# Altium PCB cahrgebot_digital.PcbDoc (part 1 of 2)
Units mm, origin at the board's own origin, x right, y up, seen from the top; angles counter-clockwise.
Board outline 99.66 x 99.5 mm, 4 copper layers (Top Layer, GND, POWER, Bottom Layer), stack 1.591 mm thick; 129 components, 91 nets, 432 pads, 108 vias.
Unrouted connection lines stored in the file: 110.
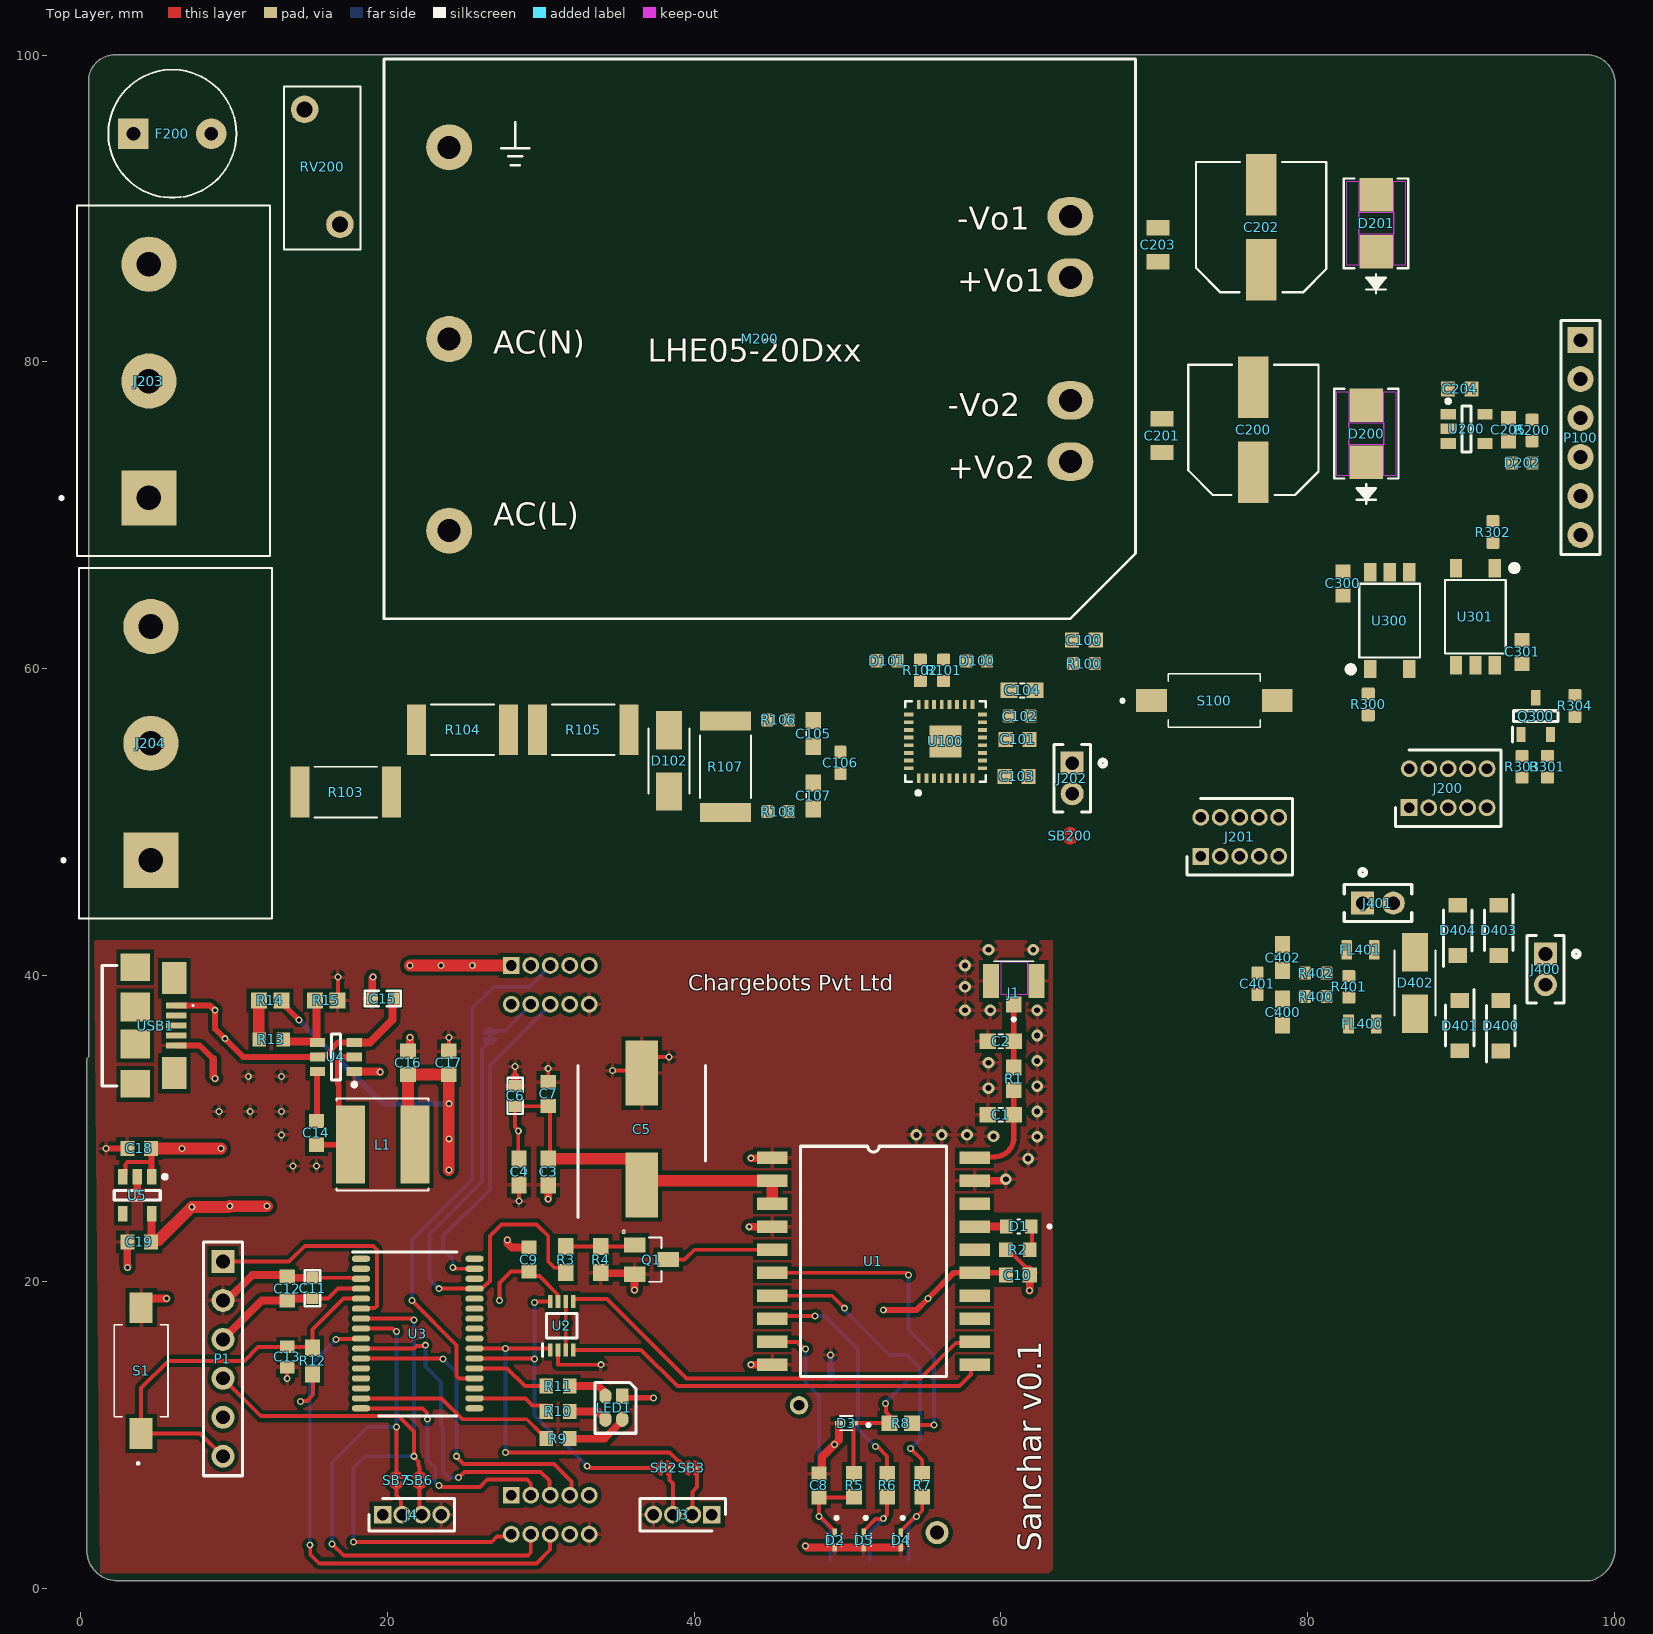
[diagram p0: Top Layer view]
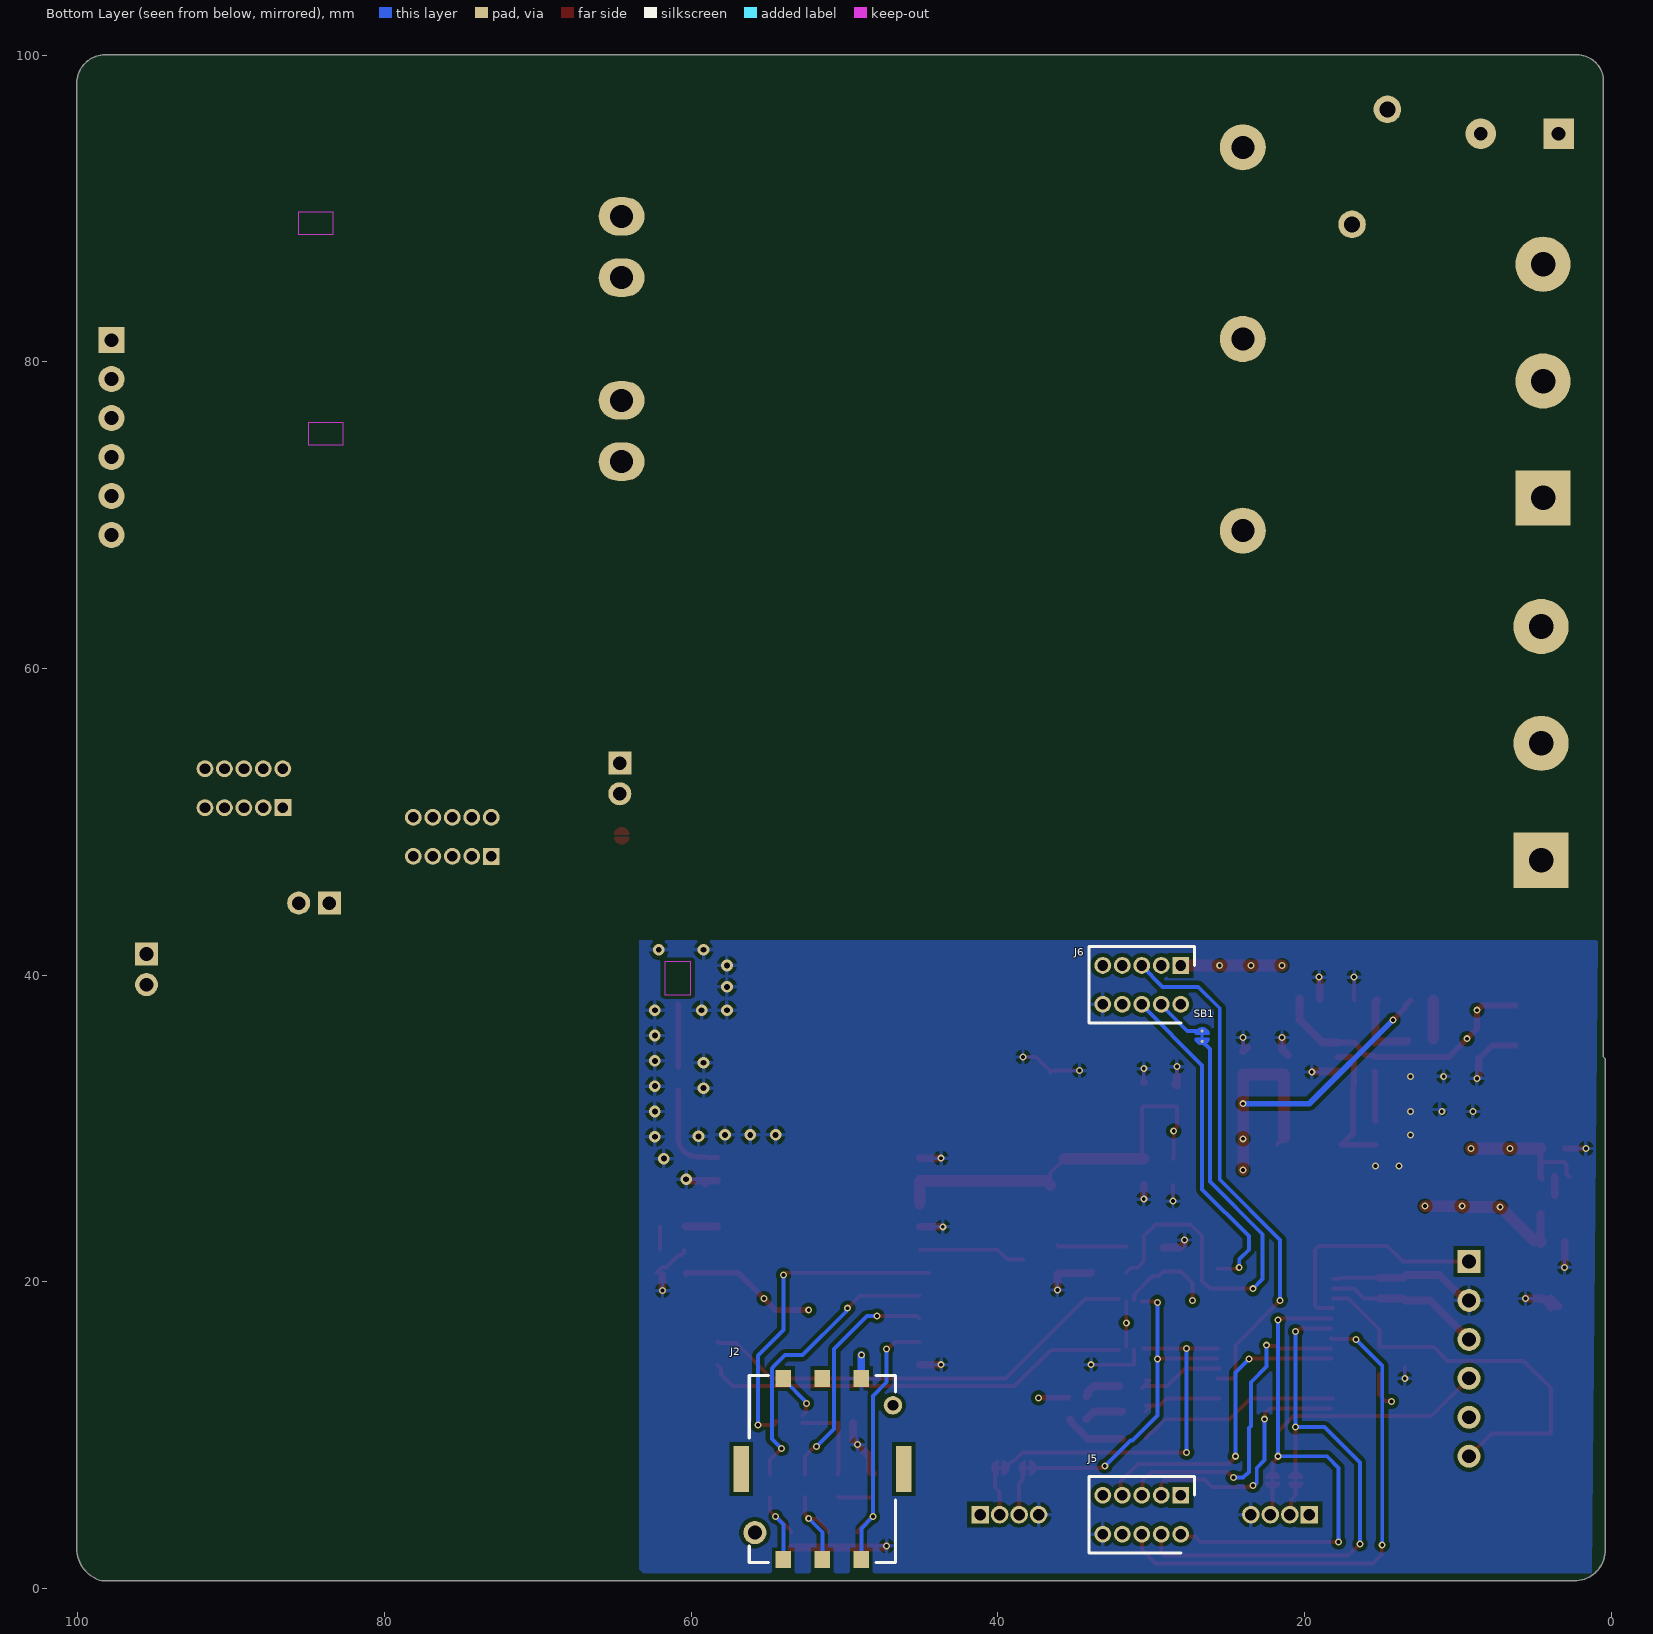
[diagram p1: Bottom Layer view, seen from below]
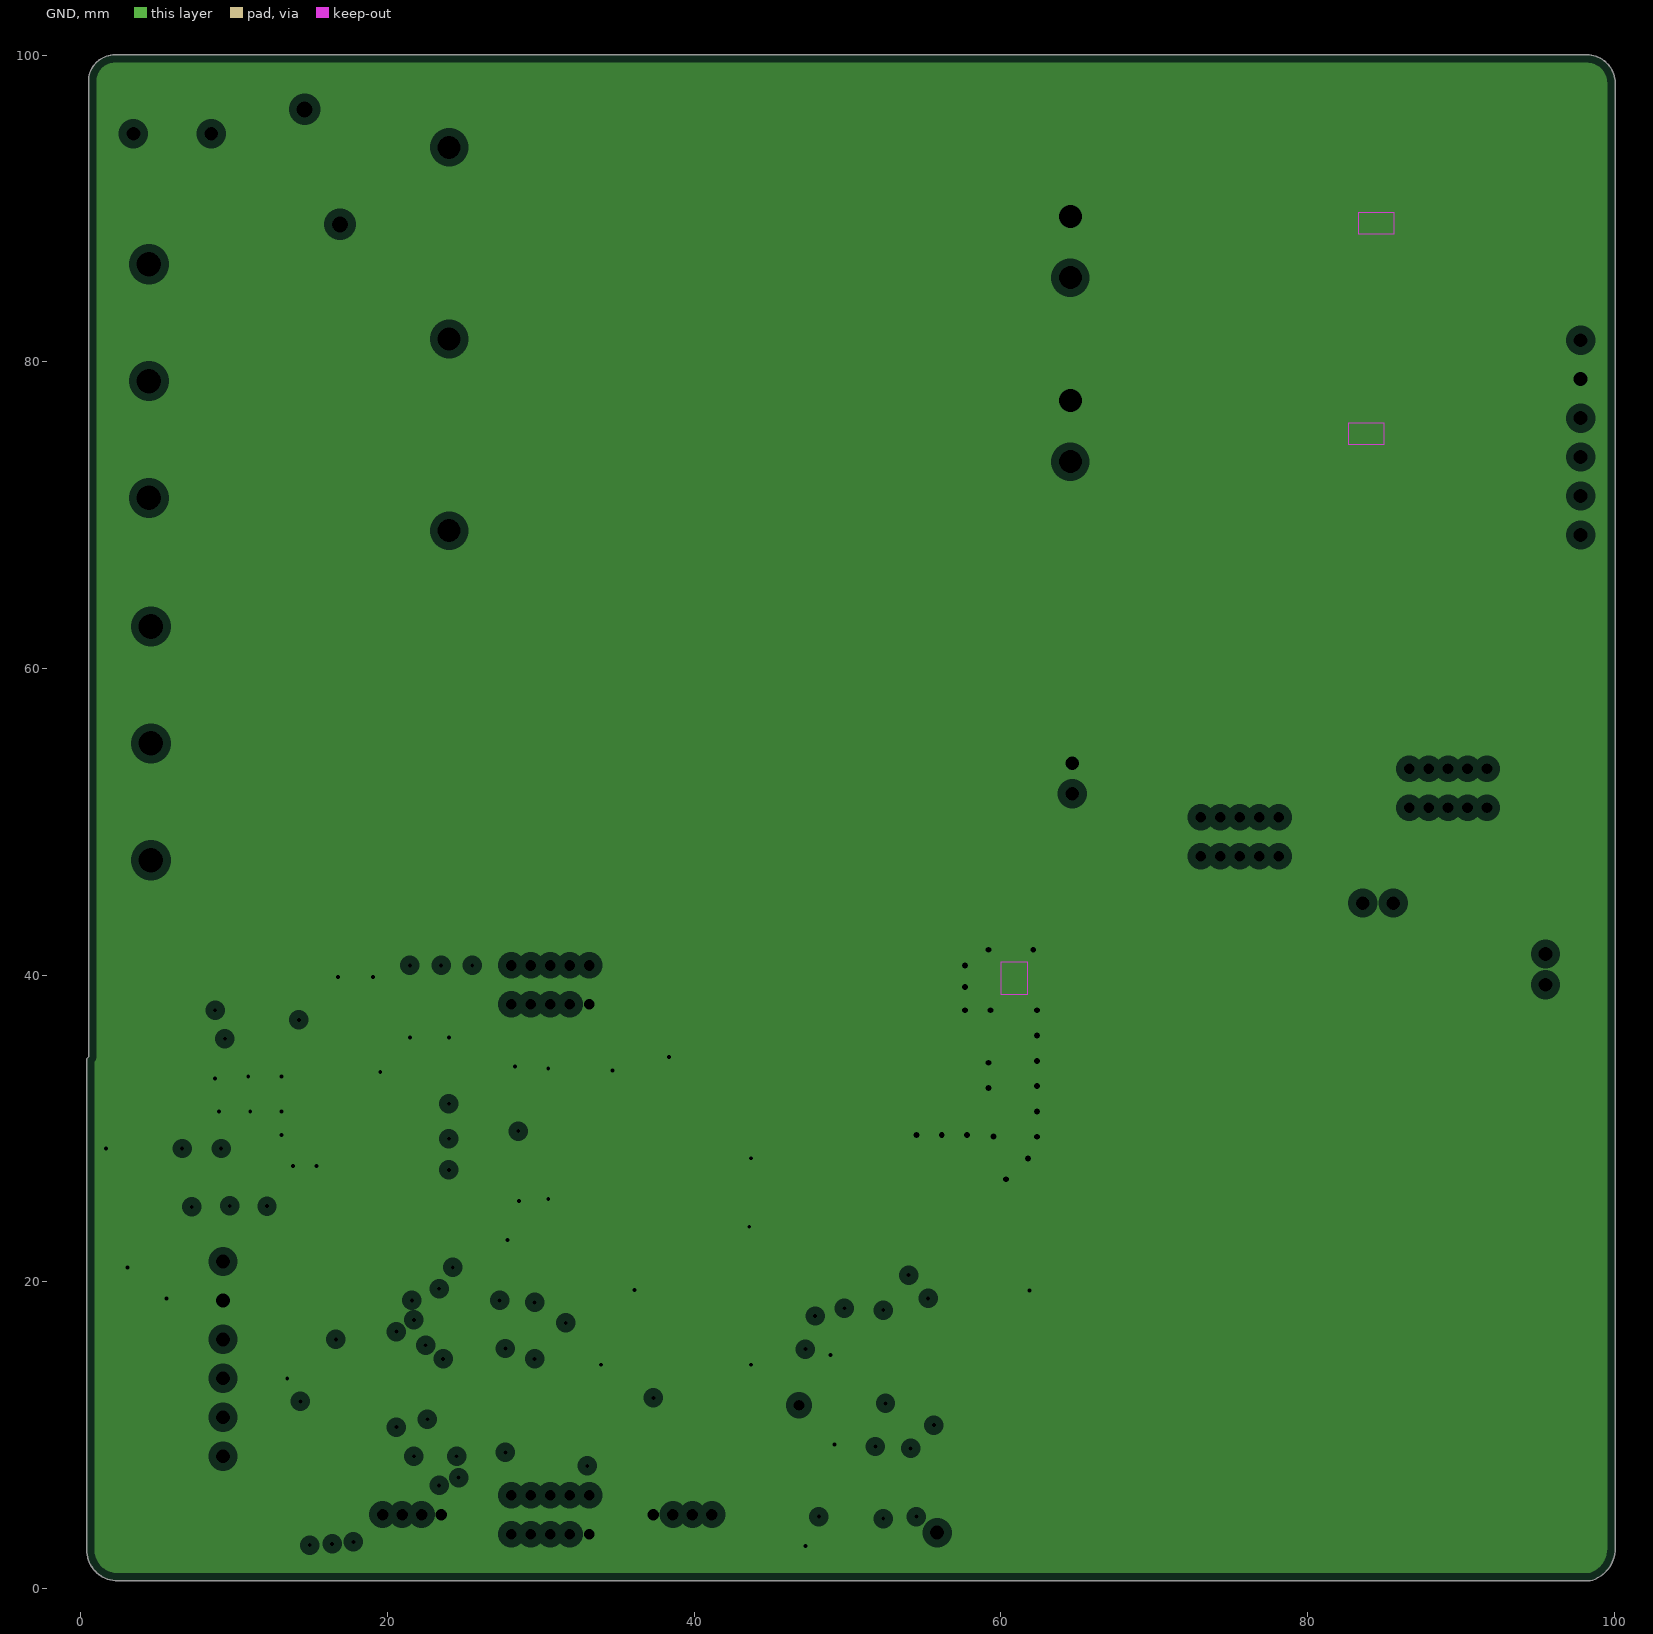
[diagram p2: GND, clearances drawn from the general rule]
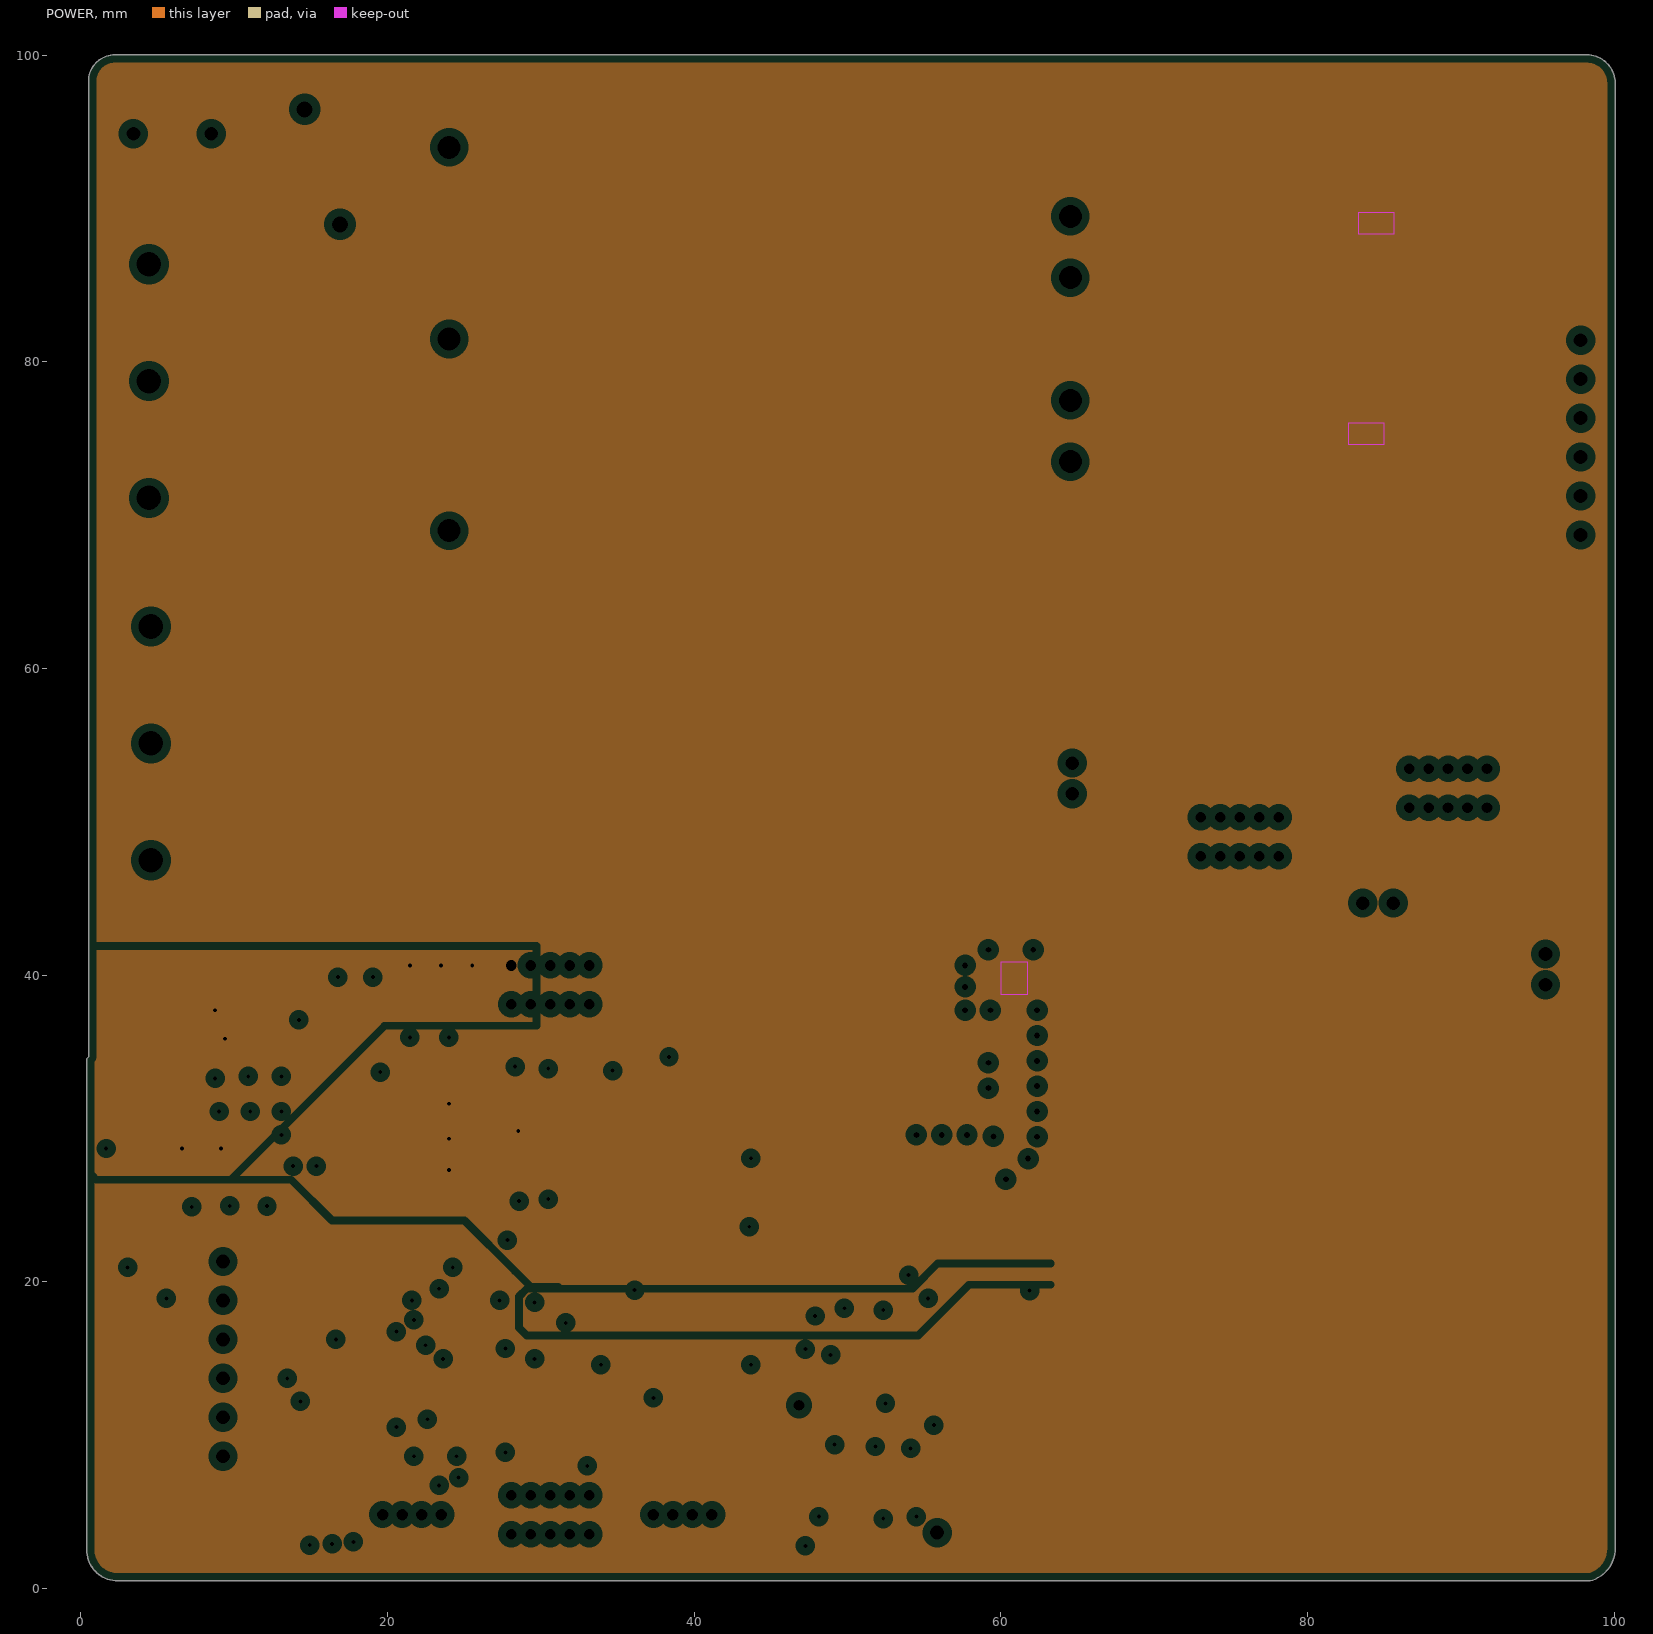
[diagram p3: POWER, clearances drawn from the general rule]

## Layer stack, top to bottom
Top Solder: solder mask 0.0203, Solder Resist, Dk 3.8
Top Layer: signal copper 0.035
Dielectric 2: prepreg 0.2104, PP-022, Dk 4.6
GND: plane copper 0.0175, net GND
Dielectric 1: core 1.065, FR-4, Dk 4.6
POWER: plane copper 0.0175, net (Multiple Nets)
Dielectric 3: prepreg 0.2104, PP-022, Dk 4.6
Bottom Layer: signal copper 0.035
Bottom Solder: solder mask 0.0203, Solder Resist, Dk 3.8

## Board outline
0.381,34.544 0.508,34.671 0.508,98.298 cw(c2.22,98.298) 2.22,100.01 98.196,100.01 cw(c98.196,98.162) 100.044,98.162 100.044,2.612 cw(c97.877,2.612) 98.41,0.512 62.103,0.512 cw(c61.976,2.539) 61.976,0.508 2.413,0.508 cw(c2.413,2.54) 0.381,2.54

## Design rules (kind name [scope] priority, off if disabled: settings)
Clearance [All] p1: gap=0.254 ignorepadtopadclearanceinfootprint=FALSE except(0: Arc-Hole Track-Hole SMDPad-SMDPad SMDPad-Hole THPad-Hole Via-Hole Fill-Hole Poly-Hole Region-Hole Text-Hole; 0.127: Arc-SMDPad Arc-THPad Arc-Text Track-SMDPad Track-THPad Track-Text SMDPad-THPad SMDPad-Text THPad-THPad THPad-Text Via-Text Fill-Text Poly-Text Region-Text Text-Text)
MinimumSolderMaskSliver [All] p1: minsoldermaskwidth=0.051
PlaneClearance [All] p1: clearance=0.508
PlaneConnect [All] p1: planeconnectstyle=Relief reliefexpansion=0.508 reliefentries=4 reliefconductorwidth=0.254 reliefairgap=0.254
PolygonConnect [All] p1: connectstyle=Relief reliefconductorwidth=0.254 reliefentries=4 polygonreliefangle="90 Angle" airgapwidth=0.254
RoutingVias [All] p1: holewidth=0.254 width=0.457 viastyle="Through Hole" minholewidth=0.254 minwidth=0.457 maxholewidth=0.635 maxwidth=1.27
SilkToSilkClearance [All] p1: silktosilkclearance=0
SilkToSolderMaskClearance [IsPad] p1: minsilkscreentomaskgap=0.051 clearancetoexposedcopper=TRUE
SolderMaskExpansion [All] p1: expansion=0.127 istentingtop=FALSE
Width RF [InNetClass('RF')] p1: maxlimit=0.345 minlimit=0.345 preferedwidth=0.345 impedanceprofiledriven=TRUE impedanceprofileid={1DD71D92-B49F-4215-806E-4DFC44349B83} impedanceprofilevalue=50.000000 minimp=50.000000 maximp=50.000000 favimp=50.000000
Width [All] p2: maxlimit=0.762 minlimit=0.254 preferedwidth=0.254
25 further rules are at their usual default settings.

## Classes and differential pairs
component class power1: C200 C201 C202 C203 C204 C205 D200 D201 D202 F200 J200 J201 J202 J203 J204 M200 R200 RV200 SB200 U200
component class interface1: C300 C301 Q300 R300 R301 R302 R303 R304 U300 U301
component class ct_interface: C400 C401 C402 D400 D401 D402 D403 D404 FL400 FL401 J400 J401 R400 R401 R402
component class AFE: C100 C101 C102 C103 C104 C105 C106 C107 D100 D101 D102 P100 R100 R101 R102 R103 R104 R105 R106 R107 R108 S100 U100
net class RF: NetC1_1 NetC2_1
component class power: C14 C15 C16 C17 C18 C19 L1 R13 R14 R15 U4 U5 USB1
component class main_controller: C11 C12 C13 LED1 P1 R9 R10 R11 R12 RGB1 S1 U3
component class interface: C9 C10 J3 J4 J5 J6 SB2 SB3 SB6 SB7 U2
component class gsm: C1 C2 C3 C4 C5 C6 C7 C8 D1 D2 D3 D4 D5 J1 J2 Q1 R1 R2 R3 R4 R5 R6 R7 R8 SB1 U1

## Components (designator, comment, footprint, x,y, rotation, side; value= is the part's Value field where it differs from the comment)
C1 "C0603C474K8PACTU" CAPC1608X90 59.983,30.9 r180 top value=DNP
C2 "C0603C474K8PACTU" CAPC1608X90 59.983,35.687 r180 top value=DNP
C3 "CC0603JPNPO9BN101" CAPC1608X90 30.48,27.178 r270 top value=100pf
C4 "CC0603JPNPO9BN330" CAPC1608X90 28.575,27.178 r90 top value=33pf
C5 "EDH477M6R3A9MAA" CAPAE830X1050N 36.576,29.972 r90 top value=470uf
C6 "10µF" CAP_0603 28.321,32.131 r90 top
C7 "06033G104ZAT4A" CAPC1608X90N#1 30.48,32.258 r270 top
C8 "EMK107B7105MA-T" CAPC1608X90N#1 48.133,6.731 r270 top value=1uf
C9 "" CAPC1608X90N#1 29.21,21.463 r270 top value=0.1uf
C10 "" CAPC1608X90N#1 61.1,20.447 r180 top value=0.1uf
C11 "10µF" CAP_0603 15.113,19.598 r90 top
C12 "06033G104ZAT4A" CAPC1608X90N#1 13.462,19.571 r270 top value=0.1uF
C13 "1000pF" CAPC1608X90N#2 13.462,15.113 r90 top
C14 "06033G104ZAT4A" CAPC1608X90N#1 15.367,29.718 r270 top value=0.1uf
C15 "10µF" CAP_0603 19.685,38.481 r180 top
C16 "GRM188R60G226MEA0D" CAPC1608X100N 21.336,34.287 r270 top value=22uf
C17 "GRM188R60G226MEA0D" CAPC1608X100N 24.003,34.29 r270 top value=22uf
C18 "06033G104ZAT4A" CAPC1608X90N#1 3.81,28.702 r0 top
C19 "06033G104ZAT4A" CAPC1608X90N#1 3.81,22.606 r0 top
C100 "06033G104ZAT4A" CAPC1608X90N#1 65.405,61.849 r180 top
C101 "06033G104ZAT4A" CAPC1608X90N#1 61.087,55.372 r180 top
C102 "10µF" "CAP_0603 - duplicate" 61.214,56.896 r0 top
C103 "06033G104ZAT4A" CAPC1608X90N#1 61.022,52.96 r180 top
C104 "C0603C474K8PACTU" CAPC1608X90 61.373,58.572 r0 top value=470uf
C105 "CC0603JRNPO9BN470" CAPC1608X90 47.752,55.753 r270 top value=47pf
C106 "VJ0603Y153KXAPW1BC" CAPC1608X87N 49.53,53.848 r90 top value=0.015uf
C107 "CC0603JRNPO9BN470" CAPC1608X90 47.752,51.689 r270 top value=47pf
C200 "EEE-FK1E221AL" EEETC1V470P 76.454,75.565 r0 top
C201 "CC0805KRX7R9BB104" CAPC2012X70N 70.485,75.184 r90 top
C202 "865081745006" EEETC1V470P 76.962,88.773 r0 top
C203 "CC0805KRX7R9BB104" CAPC2012X70N 70.231,87.63 r90 top
C204 "06033G104ZAT4A" CAPC1608X90N#1 89.916,78.232 r180 top
C205 "06033G104ZAT4A" CAPC1608X90N#1 93.091,75.565 r90 top
C300 "06033G104ZAT4A" CAPC1608X90N#1 82.296,65.545 r90 top value=0.1uf
C301 "06033G104ZAT4A" CAPC1608X90N#1 93.98,61.087 r270 top value=0.1uf
C400 "CC0603JRNPO9BN470" CAPC1608X90 78.359,37.592 r270 top value=47pf
C401 "VJ0603Y153KXAPW1BC" CAPC1608X87N 76.721,39.446 r270 top value=0.015uf
C402 "CC0603JRNPO9BN470" CAPC1608X90 78.359,41.148 r90 top value=47pf
D1 "LTST-C190KRKT" LEDC1608X35N 61.166,23.622 r180 top
D2 "ESD9X5.0ST5G" SODFL1006X43N 49.149,3.175 r270 top
D3 "ESD9X5.0ST5G" SODFL1006X43N 49.911,10.795 r180 top
D4 "ESD9X5.0ST5G" SODFL1006X43N 53.467,3.175 r270 top
D5 "ESD9X5.0ST5G" SODFL1006X43N 51.054,3.175 r270 top
D100 "LED-BLUE" LED-0603-BLUE 58.411,60.502 r0 top
D101 "LED-BLUE" LED-0603-BLUE 52.567,60.505 r180 top
D102 "SMAJ5.0CA-13-F" DIOM5126X229N 38.354,53.975 r270 top
D200 "SMBJ7.0A" DIOM5436X261N 83.82,75.311 r90 top
D201 "SMBJ20A" DIOM5436X261N 84.455,89.027 r90 top
D202 "LED-BLUE" LED-0603-BLUE 93.98,73.406 r180 top
D400 "1N4148W_R1_00001" SOD3816X135N 92.583,36.703 r90 top
D401 "1N4148W_R1_00001" SOD3816X135N 89.916,36.714 r270 top
D402 "SMAJ5.0CA-13-F" DIOM5126X229N 86.995,39.497 r90 top
D403 "1N4148W_R1_00001" SOD3816X135N 92.456,42.926 r270 top
D404 "1N4148W_R1_00001" SOD3816X135N 89.789,42.926 r90 top
F200 "MRT-500-AMMO" FUSE_MRT-500-AMMO 3.429,94.869 r0 top
FL400 "BLM21BD121SN1D" BEADC2012X105N 83.566,36.83 r180 top
FL401 "BLM21BD121SN1D" BEADC2012X105N 83.439,41.656 r180 top
J1 "2337019-1" 23370191 60.833,39.624 r0 top
J2 "SIM8051-6-0-14-01-X-REVD" GCT_SIM8051-6-0-14-01-X-REVD 51.435,7.805 r180 bottom
J3 "M50-3530442" HDRV4W40P0X127_1X4_508X210X420P 41.148,4.826 r180 top
J4 "M50-3530442" HDRV4W40P0X127_1X4_508X210X420P 19.685,4.826 r0 top
J5 "TMS-105-01-L-D" HDRV10W51P254X127_2X5_635X498X838P 28.067,6.096 r0 bottom locked
J6 "TMS-105-01-L-D" HDRV10W51P254X127_2X5_635X498X838P 28.067,40.64 r0 bottom locked
J200 "TMS-105-01-L-D" "HDRV10W51P254X127_2X5_635X498X838P - duplicate" 86.614,50.927 r0 top
J201 "TMS-105-01-L-D" "HDRV10W51P254X127_2X5_635X498X838P - duplicate" 73.025,47.752 r0 top
J202 "MTMM-101-10-G-D-135" SAMTEC_MTMM-101-10-G-D-135 64.643,52.832 r180 top
J203 "TB005_-762-03BE" "CUI_TB005 -762-03BE" 4.445,71.12 r90 top
J204 "TB005_-762-03BE" "CUI_TB005 -762-03BE" 4.572,47.498 r90 top
J400 "MTMM-101-10-G-D-135" SAMTEC_MTMM-101-10-G-D-135 95.504,40.386 r180 top
J401 "MTMM-101-10-G-D-135" SAMTEC_MTMM-101-10-G-D-135 84.582,44.704 r270 top
L1 "VLS6045AF-3R3N" IND_VLS6045AF-3R3N 19.685,28.956 r0 top value=3.3mH
LED1 "rgb_led" SOP4 35.306,12.549 r270 top
M200 "LHE05-20D0512-01" LHE05-20Dxx 44.196,78.74 r0 top
P1 "Header 6" HDR1X6 9.271,21.336 r270 top
P100 "Header 6" "HDR1X6 - duplicate" 97.79,81.407 r270 top
Q1 "MMBT3904" SOT95P240X120-3N 37.211,21.463 r270 top
Q300 "MMBT5087LT3G" SOT96P237X111-3N 94.869,56.896 r90 top
R1 "RC0603JR-070RL" RESC1607X60N 60.833,33.247 r90 top value=0
R2 "CR0603-FX-1001ELF" RESC1608X55N 61.087,22.098 r0 top value=1k
R3 "RC0603FR-0747KL" RESC1608X55 31.623,21.463 r90 top value=4.7K
R4 "RC0603FR-0747KL" RESC1608X55 33.909,21.463 r90 top value=47K
R5 "RC0603FR-0710KL" RESC1607X60N 50.419,6.731 r270 top value=10K
R6 "RC0603FR-0720RL" RESC1607X60N 52.578,6.731 r270 top value=20
R7 "RC0603FR-0720RL" RESC1607X60N 54.864,6.731 r270 top value=20
R8 "RC0603FR-0720RL" RESC1607X60N 53.467,10.795 r180 top value=20
R9 "RC0603FR-0747KL" RESC1508X50N 31.115,9.779 r0 top value=1K
R10 "RC0603FR-0747KL" RESC1508X50N 31.118,11.557 r0 top value=1K
R11 "RC0603FR-0747KL" RESC1508X50N 31.118,13.208 r0 top value=1K
R12 "RC0603FR-0747KL" RESC1608X55 15.113,14.859 r270 top value=47K
R13 "CR0603-FX-1001ELF" RESC1608X55N 12.428,35.814 r180 top value=1K
R14 "RC0603FR-0739KL" RESC1607X60N 12.346,38.354 r0 top value=39K
R15 "RC0603FR-0710KL" RESC1607X60N 16.002,38.354 r0 top value=10K
R100 "RC0603FR-0747KL" "RESC1608X55 - duplicate" 65.405,60.325 r0 top value=47K
R101 "SR0603KR-7W270RL" "RESC1608X55 - duplicate" 56.261,59.879 r270 top
R102 "SR0603KR-7W270RL" "RESC1608X55 - duplicate" 54.737,59.879 r270 top
R103 "CRCW2512330KFKEG" RESC6331X70N 17.272,51.943 r0 top value=330K
R104 "CRCW2512330KFKEG" RESC6331X70N 24.892,56.007 r0 top value=330K
R105 "CRCW2512330KFKEG" RESC6331X70N 32.766,56.007 r0 top value=330K
R106 "CR0603-FX-1000ELF" "RESC1608X55N - duplicate" 45.466,56.642 r0 top value=100
R107 "CRCW25121K50JNEG" RESC6331X70N 42.037,53.594 r90 top value=1.5K
R108 "CR0603-FX-1001ELF" "RESC1608X55N - duplicate" 45.466,50.673 r0 top value=1K
R200 "SR0603KR-7W270RL" "RESC1608X55 - duplicate" 94.631,75.52 r90 top
R300 "RC0603FR-0710KL" "RESC1607X60N - duplicate" 83.947,57.658 r270 top
R301 "CR0603-FX-1001ELF" "RESC1608X55N - duplicate" 95.631,53.594 r90 top
R302 "RC0603FR-0710KL" "RESC1607X60N - duplicate" 92.075,68.899 r270 top value=10k
R303 "CR0603-FX-1001ELF" "RESC1608X55N - duplicate" 93.98,53.594 r90 top
R304 "CR0603-FX-1000ELF" "RESC1608X55N - duplicate" 97.415,57.559 r90 top
R400 "CR0603-FX-1001ELF" "RESC1608X55 - duplicate" 80.518,38.608 r0 top value=1K
R401 "CR0603-FX-1001ELF" "RESC1608X55N - duplicate" 82.677,39.243 r270 top value=13
R402 "CR0603-FX-1001ELF" "RESC1608X55N - duplicate" 80.518,40.132 r0 top value=1K
RV200 "S14K300" S14K300 15.748,92.71 r270 top
S1 "PTS636_SM43_SMTR_LFS" PTS636SM43SMTRLFS 3.937,14.224 r90 top
S100 "PTS636_SM43_SMTR_LFS" "PTS636SM43SMTRLFS - duplicate" 73.914,57.912 r0 top
SB1 "Solderbridge" SOLDERBRIDGE_SHORTED 26.67,35.687 r90 bottom net-tie
SB2 "Solderbridge" SOLDERBRIDGE_SHORTED 38.395,7.874 r180 top net-tie
SB3 "Solderbridge" SOLDERBRIDGE_SHORTED 40.173,7.874 r180 top net-tie
SB6 "Solderbridge" SOLDERBRIDGE_SHORTED 22.098,7.407 r270 top net-tie
SB7 "Solderbridge" SOLDERBRIDGE_SHORTED 20.574,6.731 r90 top net-tie
SB200 "Solderbridge" SOLDERBRIDGE_OPEN 64.516,48.778 r90 top
U1 "This is Neoway N11 Module" N11_20P 45.085,28.098 r0 top
U2 "TXB0102DCURG4" SOP50P310X90-8N 31.369,17.145 r90 top
U3 "MSP430FR2633IDA" DA0032A_L 21.971,16.637 r0 top
U4 "AP62301WU-7" AP62301WU-7 16.637,34.671 r180 top
U5 "NCP115ASN330T2G" NCP115 3.683,25.654 r270 top
U100 "MSP430I2040TRHBR" RHB32_TEX 56.388,55.245 r90 top
U200 "NCP115ASN330T2G" "NCP115 - duplicate" 90.354,75.626 r0 top
U300 "TLP2395" "5pin SO6_TOS" 85.344,63.119 r90 top
U301 "TLP2395" "5pin SO6_TOS" 90.932,63.373 r270 top
USB1 "10118192-0002LF" 101181920002LF 3.923,36.718 r270 top

## Footprints (in the part's own frame and the unit in brackets; to place one, negate y for a bottom-side part, rotate by r counter-clockwise, add the part's x,y. Pads: shape width x height; smd on the part's side, far side on the other; paste and mask are expansions set on the pad)
"5pin SO6_TOS" [mm]
  rect 1.2x0.8 smd paste+0 mask+0.076: 1(-3.15,1.27) 3(-3.15,-1.27) 4(3.15,-1.27) 5(3.15,0) 6(3.15,1.27)
  silkscreen extent -3.37,-1.98 2.4,2.74, body extent -3.5,-1.85 3.5,1.85, height 2.2
23370191 [mm]
  rect 1x1.05 smd: 1(0,-1.525)
  rect 1.05x2.2 smd: 2(-1.475,0) 3(1.475,0)
  silkscreen extent -1.3,-2.6 1.3,1.3, body extent -1.5,-1.46 1.5,1.64, height 1.25
101181920002LF [mm]
  rect 0.4x1.35 smd: 1(-1.3,2.3) 2(-0.65,2.3) 3(0,2.3) 4(0.65,2.3) 5(1.3,2.3)
  rect 2.1x1.6 smd: MP1(-3.1,2.175) MP2(3.1,2.175)
  rect 1.8x1.9 smd: MP3(-3.8,-0.375) MP4(3.8,-0.375)
  rect 1.9x1.9 smd: MP5(-1.2,-0.375) MP6(1.2,-0.375)
  silkscreen extent -3.93,-2.52 3.93,3.44, body extent -3.96,-2.33 3.96,2.77, height 2.77
AP62301WU-7 [mm]
  rect 1x0.6 smd: 1(-1.2,0.95) 2(-1.2,0) 3(-1.2,-0.95) 4(1.2,-0.95) 5(1.2,0) 6(1.2,0.95)
  silkscreen extent -1.33,-1.5 0.3,1.92, body extent -1.3,-1.5 1.3,1.5, height 1.1
BEADC2012X105N [mm]
  rrect10% 0.7x1.25 smd mask+0.076: 1(-0.9,0) 2(0.9,0)
  body extent -1,-0.63 1,0.63, height 1.05
CAP_0603 [mm]
  rect 0.75x0.8 smd: 1(-0.675,0) 2(0.675,0)
  silkscreen extent -1.18,-0.5 1.18,0.5, body extent -0.8,-0.4 0.8,0.4, height 0.78
"CAP_0603 - duplicate" [mm]
  rrect25% 0.8x0.85 smd mask+0.076: 1(-0.7,0) 2(0.7,0)
  body extent -0.8,-0.4 0.8,0.4, height 0.78
CAPAE830X1050N [mm]
  rect 4.25x2.1 smd: 1(-3.65,0) 2(3.65,0)
  silkscreen extent -5.77,-4.15 4.15,4.15, body extent -5.25,-4.25 5.25,4.25, height 10.51
CAPC1608X87N [mm]
  rrect25% 0.85x0.8 smd mask+0.076: 1(-0.7,0) 2(0.7,0)
  body extent -0.86,-0.41 0.74,0.39, height 0.9
CAPC1608X90 [mm]
  rect 1.1x1 smd: 1(-0.85,0) 2(0.85,0)
  silkscreen extent -0.15,-0.45 0.15,0.45, body extent -0.8,-0.4 0.8,0.4, height 0.9
CAPC1608X90N#1 [mm]
  rect 0.92x0.98 smd: 1(-0.775,0) 2(0.775,0)
  body extent -0.8,-0.41 0.8,0.41, height 0.9
CAPC1608X90N#2 [mm]
  rect 0.81x0.94 smd: 1(-0.67,0) 2(0.67,0)
  body extent -0.8,-0.4 0.8,0.4, height 0.9
CAPC1608X100N [mm]
  rect 1x1.02 smd: 1(-0.759,0) 2(0.759,0)
  body extent -0.8,-0.4 0.8,0.4, height 1
CAPC2012X70N [mm]
  rect 1x1.5 smd: 1(-1.1,0) 2(1.1,0)
"CUI_TB005 -762-03BE" [mm]
  rect 3.6x3.6 hole 1.6: 1(0,0)
  round 3.6 hole 1.6: 2(7.62,0) 3(15.24,0)
  silkscreen extent -3.79,-7.9 19.07,5.8
DA0032A_L [mm]
  oval 1.2x0.4 smd paste+0 mask+0.051: 1(-3.7,4.875) 2(-3.7,4.225) 3(-3.7,3.575) 4(-3.7,2.925) 5(-3.7,2.275) 6(-3.7,1.625) 7(-3.7,0.975) 8(-3.7,0.325) 9(-3.7,-0.325) 10(-3.7,-0.975) 11(-3.7,-1.625) 12(-3.7,-2.275) 13(-3.7,-2.925) 14(-3.7,-3.575) 15(-3.7,-4.225) 16(-3.7,-4.875) 17(3.7,-4.875) 18(3.7,-4.225) 19(3.7,-3.575) 20(3.7,-2.925) 21(3.7,-2.275) 22(3.7,-1.625) 23(3.7,-0.975) 24(3.7,-0.325) 25(3.7,0.325) 26(3.7,0.975) 27(3.7,1.625) 28(3.7,2.275) 29(3.7,2.925) 30(3.7,3.575) 31(3.7,4.225) 32(3.7,4.875)
  silkscreen extent -4.25,-5.37 2.55,5.33, body extent -4.05,-5.5 4.05,5.5, height 1.09
DIOM5126X229N [mm]
  rect 2.5x1.7 smd mask+0.076: 1(-2,0) 2(2,0)
  silkscreen extent -2.12,-1.33 2.12,1.33
DIOM5436X261N [mil]
  rect 86x86 smd paste+0 mask+0: 1(-73,0) 2(73,0)
  Top Layer keep-out region: -28,-45 -28,45 28,45 28,-45
  Top Layer keep-out region: -108,45 -108,75.5 108,75.5 108,45
  Top Layer keep-out region: -108,-75.5 -108,-45 108,-45 108,-75.5
  Keep-Out Layer region: -28,-45 -28,45 28,45 28,-45
  silkscreen extent -180,-82 115,82, body extent -110,-77 110,77, height 98
EEETC1V470P [mm]
  rect 2x4 smd mask+0.076: 1(0,-2.775) 2(0,2.775)
  silkscreen extent -4.25,-4.25 4.25,4.25
FUSE_MRT-500-AMMO [mm]
  rect 2x2 hole 0.9: 1(0,0)
  round 2 hole 0.9: 2(5.08,0)
  silkscreen extent -1.64,-4.17 6.72,4.17
GCT_SIM8051-6-0-14-01-X-REVD [mm]
  round 1.5 hole 0.9: 1(-4.4,-4.15)
  round 1.2 hole 0.7: 2(4.6,4.15)
  rect 1x3 smd: 6(5.3,0) 10(-5.3,0)
  rect 1x1.1 smd: C1(2.54,-5.9) C2(0,-5.9) C3(-2.54,-5.9) C5(2.54,5.9) C6(0,5.9) C7(-2.54,5.9)
  silkscreen extent -4.77,-6.1 4.77,6.1
HDR1X6 [mm] "Connector; Header; 6 Position"
  rect 1.5x1.5 hole 0.9: 1(0,0)
  round 1.5 hole 0.9: 2(2.54,0) 3(5.08,0) 4(7.62,0) 5(10.16,0) 6(12.7,0)
  silkscreen extent -1.27,-1.27 13.97,1.27
"HDR1X6 - duplicate" [mm] "Connector; Header; 6 Position"
  rect 1.7x1.7 hole 0.9 mask+0.076: 1(0,0)
  round 1.7 hole 0.9 mask+0.076: 2(2.54,0) 3(5.08,0) 4(7.62,0) 5(10.16,0) 6(12.7,0)
  silkscreen extent -1.27,-1.27 13.97,1.27
HDRV4W40P0X127_1X4_508X210X420P [mm]
  rect 1.15x1.15 hole 0.75: 1(0,0)
  round 1.15 hole 0.75: 2(1.27,0) 3(2.54,0) 4(3.81,0)
  silkscreen extent -0.88,-1.05 4.69,1.05, body extent -0.64,-1.05 4.44,1.05, height 4
HDRV10W51P254X127_2X5_635X498X838P [mm]
  rect 1.1x1.1 hole 0.7: 1(0,0)
  round 1.1 hole 0.7: 2(0,2.54) 3(1.27,0) 4(1.27,2.54) 5(2.54,0) 6(2.54,2.54) 7(3.81,0) 8(3.81,2.54) 9(5.08,0) 10(5.08,2.54)
  silkscreen extent -0.9,-1.22 5.98,3.76, body extent -0.64,-1.22 5.71,3.76, height 8.38
"HDRV10W51P254X127_2X5_635X498X838P - duplicate" [mm]
  rect 1.1x1.1 hole 0.7 mask+0.076: 1(0,0)
  round 1.1 hole 0.7 mask+0.076: 2(0,2.54) 3(1.27,0) 4(1.27,2.54) 5(2.54,0) 6(2.54,2.54) 7(3.81,0) 8(3.81,2.54) 9(5.08,0) 10(5.08,2.54)
  silkscreen extent -0.9,-1.22 5.98,3.76, body extent -0.64,-1.22 5.71,3.76, height 8.38
IND_VLS6045AF-3R3N [mm]
  rect 1.9x5.1 smd: 1(-2.1,0) 2(2.1,0)
  silkscreen extent -3,-3 3,3, body extent -3,-3 3,3, height 4.5
LED-0603-BLUE [mm]
  rrect10% 0.8x0.85 smd: 1(-0.675,0) 2(0.675,0)
  body extent -0.93,-0.4 0.67,0.4, height 0.6
LEDC1608X35N [mm]
  rect 0.81x0.93 smd: A(0.81,0) C(-0.81,0)
  silkscreen extent -2.1,-0.45 0.09,0.45, body extent -0.4,-0.8 0.4,0.8, height 0.8
LHE05-20Dxx [mm]
  round 3 hole 1.5: 2(-20.172,15.244) 3(-20.172,2.744) 4(-20.172,-9.756)
  oval 3x2.5 hole 1.5: 5(20.328,-5.256) 6(20.328,-1.256) 7(20.328,6.744) 8(20.328,10.744)
  silkscreen extent -24.42,-15.51 24.58,20.99
N11_20P [mm]
  rect 2x0.8 smd: 1(0,0) 2(0,-1.5) 3(0,-3) 4(0,-4.5) 5(0,-6) 6(0,-7.5) 7(0,-9) 8(0,-10.5) 9(0,-12) 10(0,-13.5) 11(13.2,-13.5) 12(13.2,-12) 13(13.2,-10.5) 14(13.2,-9) 15(13.2,-7.5) 16(13.2,-6) 17(13.2,-4.5) 18(13.2,-3) 19(13.2,-1.5) 20(13.2,0)
  silkscreen extent 1.84,-14.25 11.36,0.75
NCP115 [mm]
  rect 1x0.6 smd: 1(-1.2,0.95) 2(-1.2,0) 3(-1.2,-0.95) 4(1.2,-0.95) 5(1.2,0.95)
  silkscreen extent -1.32,-1.5 0.3,1.93, body extent -0.7,-1.5 0.7,1.5, height 1.1
"NCP115 - duplicate" [mm]
  rect 1x0.7 smd: 1(-1.2,0.95) 2(-1.2,0) 3(-1.2,-0.95) 4(1.2,-0.95) 5(1.2,0.95)
  silkscreen extent -1.32,-1.5 0.3,1.92, body extent -0.7,-1.5 0.7,1.5, height 1.1
PTS636SM43SMTRLFS [mm]
  rect 2x1.5 smd: 1(-4.1,0) 2(4.1,0)
  silkscreen extent -6.1,-1.75 3,1.75, body extent -3.47,-1.75 3.63,1.75, height 4.3
"PTS636SM43SMTRLFS - duplicate" [mm]
  rect 2x1.5 smd: 1(-4.1,0) 2(4.1,0)
  silkscreen extent -6.1,-1.75 3,1.75, body extent -3.55,-1.75 3.55,1.75, height 4.3
RESC1508X50N [mm]
  rect 0.86x0.98 smd: 1(-0.765,0) 2(0.765,0)
  body extent -0.77,-0.43 0.77,0.43, height 0.5
RESC1607X60N [mm]
  rect 1.04x1.02 smd: 1(-0.735,0) 2(0.735,0)
"RESC1607X60N - duplicate" [mm]
  rrect25% 0.8x0.85 smd mask+0.076: 1(-0.7,0) 2(0.7,0)
  body extent -0.8,-0.4 0.8,0.4, height 0.78
RESC1608X55 [mm]
  rect 1.1x1 smd: 1(-0.85,0) 2(0.85,0)
"RESC1608X55 - duplicate" [mm]
  rrect25% 0.8x0.85 smd mask+0.076: 1(-0.7,0) 2(0.7,0)
  body extent -0.8,-0.4 0.8,0.4, height 0.78
RESC1608X55N [mm]
  rect 0.87x0.93 smd: 1(-0.78,0) 2(0.78,0)
  body extent -0.8,-0.4 0.8,0.4, height 0.55
"RESC1608X55N - duplicate" [mm]
  rrect25% 0.8x0.85 smd mask+0.076: 1(-0.7,0) 2(0.7,0)
  body extent -0.8,-0.4 0.8,0.4, height 0.78
RESC6331X70N [mm]
  rect 1.24x3.32 smd: 1(-2.99,0) 2(2.99,0)
  silkscreen extent -2.05,-1.65 2.05,1.65, body extent -3.15,-1.58 3.15,1.58, height 0.7
RHB32_TEX [mm]
  rrect10% 0.6x0.25 smd paste-2.1 mask+0.076: 1(-2.4,1.75) 2(-2.4,1.25) 3(-2.4,0.75) 4(-2.4,0.25) 5(-2.4,-0.25) 6(-2.4,-0.75) 7(-2.4,-1.25) 8(-2.4,-1.75) 17(2.4,-1.75) 18(2.4,-1.25) 19(2.4,-0.75) 20(2.4,-0.25) 21(2.4,0.25) 22(2.4,0.75) 23(2.4,1.25) 24(2.4,1.75)
  rrect10% 0.25x0.6 smd paste-2.1 mask+0.076: 9(-1.75,-2.4) 10(-1.25,-2.4) 11(-0.75,-2.4) 12(-0.25,-2.4) 13(0.25,-2.4) 14(0.75,-2.4) 15(1.25,-2.4) 16(1.75,-2.4) 25(1.75,2.4) 26(1.25,2.4) 27(0.75,2.4) 28(0.25,2.4) 29(-0.25,2.4) 30(-0.75,2.4) 31(-1.25,2.4) 32(-1.75,2.4)
  rect 2.1x2.1 smd paste-2.1 mask+0.076: 33(0,0)
  silkscreen extent -3.48,-2.63 2.63,2.63, body extent -2.5,-2.5 2.5,2.5, height 1
S14K300 [mm]
  round 1.8 hole 1.05: 1(-3.75,-1.15) 2(3.75,1.15)
  silkscreen extent -5.25,-2.5 5.38,2.5
SAMTEC_MTMM-101-10-G-D-135 [mm]
  rect 1.5x1.5 hole 0.89: 01(0,-1)
  round 1.5 hole 0.89: 02(0,1)
  silkscreen extent -2.2,-2.2 1.2,2.2
SOD3816X135N [mm]
  rect 0.97x1.22 smd mask+0.076: 1(-1.64,0) 2(1.64,0)
  silkscreen extent -2.35,-0.92 1.32,0.93, body extent -1.88,-0.8 1.88,0.8, height 1.35
SODFL1006X43N [mm]
  rect 0.54x0.3 smd: A(0.48,0) C(-0.48,0)
  silkscreen extent -1.55,-0.47 0.4,0.47, body extent -0.5,-0.3 0.5,0.3, height 0.4
SOLDERBRIDGE_OPEN [mm]
  round 0.2 smd paste-10: 1(0,0) 2(0.625,0)
  Top Layer region: 0.236,-0.432 0.16,-0.505 0.042,-0.467 -0.023,-0.424 -0.097,-0.351 -0.15,-0.292 -0.208,-0.193 -0.236,-0.099 -0.231,0.122 -0.206,0.193 -0.122,0.33 -0.038,0.411 0.054,0.469 0.155,0.5 0.206,0.483 0.236,0.43
  Top Layer region: 0.389,0.432 0.465,0.505 0.583,0.467 0.648,0.424 0.721,0.351 0.775,0.292 0.833,0.193 0.861,0.099 0.856,-0.122 0.831,-0.193 0.747,-0.33 0.663,-0.411 0.571,-0.469 0.47,-0.5 0.419,-0.483 0.389,-0.43
  Top Layer lines w0.152: 0.159,0.431 ccw(c0.27,0) -0.175,0 ccw(c0.27,0) 0.159,-0.431 ; 0.465,0.431 cw(c0.355,0) 0.782,0.122 cw(c0.355,0) 0.799,0 cw(c0.355,0) 0.465,-0.431
SOLDERBRIDGE_SHORTED [mm]
  round 0.2 smd paste-10: 1(0,0) 2(0.676,0)
  Top Layer region: 0.44,0.432 0.516,0.505 0.634,0.467 0.699,0.424 0.772,0.351 0.826,0.292 0.884,0.193 0.912,0.099 0.907,-0.122 0.881,-0.193 0.798,-0.33 0.714,-0.411 0.622,-0.469 0.521,-0.5 0.47,-0.483 0.44,-0.43
  Top Layer region: 0.236,-0.432 0.16,-0.505 0.042,-0.467 -0.023,-0.424 -0.097,-0.351 -0.15,-0.292 -0.208,-0.193 -0.236,-0.099 -0.231,0.122 -0.206,0.193 -0.122,0.33 -0.038,0.411 0.054,0.469 0.155,0.5 0.206,0.483 0.236,0.43
  Top Layer lines w0.152: 0.159,-0.431 cw(c0.27,0) 0.159,0.431 ; 0.516,-0.431 ccw(c0.406,0) 0.516,0.431
  Top Layer lines w0.203: 0,0 0.676,0
SOP4 [mm]
  rect 1x0.8 smd: 1(0,0)
  oval 1x0.8 smd: 2(0,-1.1) 3(1.5,-1.1) 4(1.5,0)
  silkscreen extent -0.89,-1.78 2.41,0.89
SOP50P310X90-8N [mm]
  rect 0.85x0.3 smd: 1(-1.575,0.75) 2(-1.575,0.25) 3(-1.575,-0.25) 4(-1.575,-0.75) 5(1.575,-0.75) 6(1.575,-0.25) 7(1.575,0.25) 8(1.575,0.75)
  silkscreen extent -2,-1 0.8,1.25, body extent -1.55,-1 1.55,1, height 0.77
SOT95P240X120-3N [mm]
  rect 1x1.4 smd: 1(-0.95,-1.1) 2(0.95,-1.1) 3(0,1.1)
  silkscreen extent -1.9,-1.9 1.45,0.65, body extent -1.2,-1.46 1.2,1.46, height 1.2
SOT96P237X111-3N [mm]
  rect 1x0.6 smd: 1(-1.2,0.955) 2(-1.2,-0.955) 3(1.2,0)
  silkscreen extent -1.7,-1.46 0.35,1.51

## Part data
C1 C2 C104: "CAP, MLCC, X5R, 0.47UF, 10V, 0603", Package=None, Availability=Unavailable, MF="{'manufacturer': u'KEMET'}", MP=C0603C474K8PACTU, Price=None
C3: "0603 100 pF 50 V Â±5% Tolerance NP0 SMT Multilayer Ceramic Capacitor", Package=None, Availability=Unavailable, MF="{'manufacturer': u'Yageo'}", MP=CC0603JPNPO9BN101, Price=None
C4: "0603 33 pF 50 V Â±5 % Tolerance C0G/NP0 SMT Multilayer Ceramic Capacitor", Package=None, Availability=Unavailable, MF="{'manufacturer': u'Yageo'}", MP=CC0603JPNPO9BN330, Price=None
C5: "Capacitor Polarised", Manufacturer_Name=KEMET, Mouser Part Number=80-EDH477M6R3A9MAA, Datasheet Link=https://content.kemet.com/datasheets/KEM_A4049_EDH.pdf, Height=10.5mm, Manufacturer_Part_Number=EDH477M6R3A9MAA, Mouser Price/Stock=https://www.mouser.co.uk/ProductDetail/KEMET/EDH477M6R3A9MAA?qs=E9QF1UCAUX5I%2FnxgAi822A%3D%3D
C6 C11 C15 C102: library part CL10A106KP8NNNC, "10µF 10V Ceramic Capacitor X5R 0603 (1608 Metric) 0.063\" L x 0.031\" W (1.60mm x 0.80mm)", Manufacturer="Samsung Electronics", Supplier Part Number 1=1276-1192-1-ND, Part Number=CL10A106KP8NNNC, Supplier 1=Digi-Key
C7 C12 C14 C18 C19 C100 C101 C103 C204 C205 C300 C301: "Cap Ceramic 0.1uF 25V Y5V -20% to 80% SMD 0603 85C T/R", Package=None, Availability=Unavailable, MF="{'manufacturer': u'AVX'}", MP=06033G104ZAT4A, Price=None
C8: "Ceramic Multilayer Capacitor; Capacitor Type:General Purpose; Capacitance:1ÂµF; Capacitance Tolerance:Â± 20%; Voltage Rating:16VDC; Capacitor Dielectric Type:Multilayer Ceramic; Package/Case:0603; Termination Type:SMD ;RoHS Compliant: Yes", Package=None, Availability=Unavailable, MF="{'manufacturer': u'Taiyo Yuden'}", MP=EMK107B7105MA-T, Price=None
C9 C10: library part 06033G104ZAT4A, "Cap Ceramic 0.1uF 25V Y5V -20% to 80% SMD 0603 85C T/R", Package=None, Availability=Unavailable, MF="{'manufacturer': u'AVX'}", MP=06033G104ZAT4A, Price=None
C13: library part 06035C102KAT4A, "Capacitor", Manufacturer_Name=AVX, Mouser Part Number=581-06035C102KAT4A, Arrow Part Number=06035C102KAT4A, Arrow Price/Stock=https://www.arrow.com/en/products/06035c102kat4a/avx, Datasheet Link=http://www.mouser.com/catalog/supplier/library/pdf/AVXSurfaceMountCeramic.pdf, Height=0.9mm, Manufacturer_Part_Number=06035C102KAT4A, Mouser Price/Stock=https://www.mouser.co.uk/ProductDetail/AVX/06035C102KAT4A?qs=ariCldvIWN%252BYB6jwt%252B7B2A%3D%3D
C16 C17: "Cap Ceramic 22uF 4V X5R 20% SMD 0603 85C T/R", Package=None, Availability=Unavailable, MF="{'manufacturer': u'Murata'}", MP=GRM188R60G226MEA0D, Price=None
C105 C107 C400 C402: "CAP CER 47PF 50V C0G/NPO 0603", Package=None, Availability=Unavailable, MF="{'manufacturer': u'Yageo'}", MP=CC0603JRNPO9BN470, Price=None
C106 C401: "VJ_W1BC", Package=None, Availability=Unavailable, MF="{'manufacturer': u'Vishay Vitramon'}", MP=VJ0603Y153KXAPW1BC, Price=None
C200: "Capacitor Polarised", Manufacturer_Name=Panasonic, Mouser Part Number=667-EEE-FK1E221AL, Datasheet Link=http://industrial.panasonic.com/cdbs/www-data/pdf/RDE0000/RDE0000C1278.pdf, Manufacturer_Part_Number=EEE-FK1E221AL, Mouser Price/Stock=https://www.mouser.co.uk/ProductDetail/Panasonic/EEE-FK1E221AL?qs=vmHwEFxEFR8%2FJK%252Brqcoc9A%3D%3D
C201 C203: "Capacitor", Manufacturer_Name=TDK, Datasheet Link=https://www.yageo.com/upload/media/product/productsearch/datasheet/mlcc/UPY-GPHC_X7R_6.3V-to-50V_20.pdf, Height=0.7mm, Manufacturer_Part_Number=CC0805KRX7R9BB104
C202: "Capacitor Polarised", Manufacturer_Name="Wurth Elektronik", Mouser Part Number=710-865081745006, Datasheet Link=https://www.we-online.com/components/products/datasheet/865081745006.pdf, Height=7.7mm, Manufacturer_Part_Number=865081745006, Mouser Price/Stock=https://www.mouser.co.uk/ProductDetail/Wurth-Elektronik/865081745006?qs=amGC7iS6iy86HOLWKe8vSw%3D%3D
D1: "LED; SMD; 0603; red; 18-180mcd; 1.6x0.8x0.8mm; 130Â°; 1.6Ã·2.4V; 20mA", Package=None, Availability=Unavailable, MF="{'manufacturer': u'Lite-On Inc.'}", MP=LTST-C190KRKT, Price=None
D2 D3 D4 D5: "ESD9X5.0S: ESD Protection Single Diode In Ultra Small SOD-923 Package", Package=None, Availability=Unavailable, MF="{'manufacturer': u'ON Semiconductor'}", MP=ESD9X5.0ST5G, Price=None
D100 D101 D202: library part LTST-C193TBKT-5A, "Blue 470nm LED Indication - Discrete 2.8V 0603 (1608 Metric)", Manufacturer=Lite-On, Supplier Part Number 1=160-1827-1-ND, Part Number=LTST-C193TBKT-5A, Supplier 1=Digi-Key
D102 D402: "9.2V Clamp 43.5A Ipp Tvs Diode Surface Mount SMA (DO-214AC)", Package=None, Availability=Unavailable, MF="{'manufacturer': u'Diodes Inc.'}", MP=SMAJ5.0CA-13-F, Price=None
D200: "TVS Diode (Uni-directional)", Manufacturer_Name=LITTELFUSE, Mouser Part Number=576-SMBJ7.0A, Arrow Part Number=SMBJ7.0A, Arrow Price/Stock=https://www.arrow.com/en/products/smbj7.0a/littelfuse?region=nac, Datasheet Link=https://componentsearchengine.com/Datasheets/2/SMBJ7.0A.pdf, Height=2.61mm, Manufacturer_Part_Number=SMBJ7.0A, Mouser Price/Stock=https://www.mouser.co.uk/ProductDetail/Littelfuse/SMBJ7.0A?qs=JJML70Qc14tN8I1Byy%252B8EA%3D%3D
D201: "TVS Diode (Uni-directional)", Manufacturer_Name=Bourns, Mouser Part Number=652-SMBJ20A, Arrow Part Number=SMBJ20A, Arrow Price/Stock=https://www.arrow.com/en/products/smbj20a/bourns?region=nac, Datasheet Link=https://www.bourns.com/docs/product-datasheets/smbj.pdf?sfvrsn=34552159_17, Height=2.44mm, Manufacturer_Part_Number=SMBJ20A, Mouser Price/Stock=https://www.mouser.co.uk/ProductDetail/Bourns/SMBJ20A?qs=%252Bf8Cd6aE5bx0luBLnSoXTg%3D%3D
D400 D401 D403 D404: "Diode", Manufacturer_Name=PANJIT, Mouser Part Number=241-1N4148W_R1_00001, Datasheet Link=https://www.mouser.com/datasheet/2/1057/1N4148W-1869619.pdf, Height=1.35mm, Manufacturer_Part_Number=1N4148W_R1_00001, Mouser Price/Stock=https://www.mouser.co.uk/ProductDetail/Panjit/1N4148W_R1_00001?qs=sPbYRqrBIVnqVztCqPNVrw%3D%3D
F200: "MRF 1-BULK (0691-1000-01)", Package=None, Availability=Unavailable, MF="{'manufacturer': u'Bel Fuse'}", MP=MRT-500-AMMO, Price=None
FL400 FL401: "Ferrite: bead; 120Î©; Mounting: SMD; 200mA; -55Ã·125Â°C", Package=None, Availability=Unavailable, MF="{'manufacturer': u'Murata Electronics'}", MP=BLM21BD121SN1D, Price=None
J1: "Connector", Manufacturer_Name="TE Connectivity", Mouser Part Number=571-2337019-1, Arrow Part Number=2337019-1, Arrow Price/Stock=https://www.arrow.com/en/products/2337019-1/te-connectivity?region=europe, Datasheet Link=https://www.te.com/commerce/DocumentDelivery/DDEController?Action=showdoc&DocId=Customer+Drawing%7FC-2337019%7FA3%7Fpdf%7FEnglish%7FENG_CD_C-2337019_A3.pdf%7F2337019-1, Height=1.4mm, Manufacturer_Part_Number=2337019-1, Mouser Price/Stock=https://www.mouser.co.uk/ProductDetail/TE-Connectivity/2337019-1?qs=l4Gc20tDgJIuN7nS9rJkJw%3D%3D
J2: "Nano SIM Card Connector, Push-Pull Type, 6 Pin, SMT, Profile 1.35mm", Package=None, Availability=Unavailable, MF="{'manufacturer': u'Global Connector Technology'}", MP=SIM8051-6-0-14-01-X-REVD, Price=None
J3 J4: "Connector", Manufacturer_Name=Harwin, Mouser Part Number=855-M50-3530442, Datasheet Link=https://cdn.harwin.com/pdfs/M50-353.pdf, Height=4.2mm, Manufacturer_Part_Number=M50-3530442, Mouser Price/Stock=https://www.mouser.co.uk/ProductDetail/Harwin/M50-3530442?qs=%252BdQmOuGyFcH%2FaHqroeU8Uw%3D%3D
J5 J6 J200 J201: "Connector", Manufacturer_Name=SAMTEC, Mouser Part Number=200-TMS10501LD, Arrow Part Number=TMS-105-01-L-D, Arrow Price/Stock=https://www.arrow.com/en/products/tms-105-01-l-d/samtec, Datasheet Link=http://suddendocs.samtec.com/catalog_english/tms_th.pdf, Height=8.38mm, Manufacturer_Part_Number=TMS-105-01-L-D, Mouser Price/Stock=https://www.mouser.com/Search/Refine.aspx?Keyword=200-TMS10501LD
J202 J203 J204 J400 J401 L1 R101 R102 R103 R104 R105 R107 R200: Package=None, Availability=Unavailable, Price=None
  J202 J400 J401: MF="{'manufacturer': u'Samtec'}", MP=MTMM-101-10-G-D-135
  J203 J204: MF="{'manufacturer': u'CUI'}", MP="TB005 -762-03BE"
  L1: MF="{'manufacturer': u'TDK Corporation'}", MP=VLS6045AF-3R3N
  R101 R102 R200: MF="{'manufacturer': u'Yageo'}", MP=SR0603KR-7W270RL
  R103 R104 R105: MF="{'manufacturer': u'Vishay'}", MP=CRCW2512330KFKEG
  R107: MF="{'manufacturer': u'Vishay'}", MP=CRCW25121K50JNEG
M200: "LHE05-20Dxx series is one of Mornsun’s compact size multiple output power converters"
P1 P100: "Header, 6-Pin", LatestRevisionDate=17-Jul-2002, LatestRevisionNote="Re-released for DXP Platform.", Publisher="Altium Limited"
Q1: "MMBT3904 Series 40 V CE Breakdown 0.2 A NPN General Purpose Amplifier - SOT-23", Package=None, Availability=Unavailable, MF="{'manufacturer': u'ON Semiconductor'}", MP=MMBT3904, Price=None
Q300: "Transistor BJT PNP", Manufacturer_Name=onsemi, Mouser Part Number=863-MMBT5087LT3G, Arrow Part Number=MMBT5087LT3G, Arrow Price/Stock=https://www.arrow.com/en/products/mmbt5087lt3g/on-semiconductor?region=nac, Datasheet Link=http://www.onsemi.com/pub/Collateral/MMBT5087LT1-D.PDF, Height=1.11mm, Manufacturer_Part_Number=MMBT5087LT3G, Mouser Price/Stock=https://www.mouser.co.uk/ProductDetail/onsemi/MMBT5087LT3G?qs=HVbQlW5zcXXV8WeqAA3nzg%3D%3D
R1: "Thick film general purpose", Package=None, Availability=Unavailable, MF="{'manufacturer': u'Yageo'}", MP=RC0603JR-070RL, Price=None
R2 R13 R108 R301 R303 R400 R401 R402: "Resistor; Thick Film; Res 1 Kilohms; Pwr-Rtg 0.1 W; Tol 1%; SMT; 0603", Package=None, Availability=Unavailable, MF="{'manufacturer': u'Bourns'}", MP=CR0603-FX-1001ELF, Price=None
R3 R4 R9 R10 R11 R12 R100: "RC Series 0603 0.1 W 47 kOhms 1% Â±100 ppm/Â°C SMT Thick Film Chip Resistor", Package=None, Availability=Unavailable, MF="{'manufacturer': u'Yageo'}", MP=RC0603FR-0747KL, Price=None
R5 R15 R300 R302: "YAGEO RC0603FR-0710KL / RESISTOR 10K 1/10W 1% 0603 YAG", Package=None, Availability=Unavailable, MF="{'manufacturer': u'Yageo'}", MP=RC0603FR-0710KL, Price=None
R6 R7 R8: "RC Series 0603 0.1 W 20 Ohms 1% Â±100 ppm/Â°C SMT Thick Film Chip Resistor", Package=None, Availability=Unavailable, MF="{'manufacturer': u'Yageo'}", MP=RC0603FR-0720RL, Price=None
R14: "Res Thick Film 1.6 x 0.8 mm 39K Ohm 1% 0.1W(1/10W) 100ppm/ C Molded SMD Paper T/R", Package=None, Availability=Unavailable, MF="{'manufacturer': u'Yageo'}", MP=RC0603FR-0739KL, Price=None
R106 R304: "SMD 0603 thick film resistor 100R 1%", Package=None, Availability=Unavailable, MF="{'manufacturer': u'Bourns'}", MP=CR0603-FX-1000ELF, Price=None
RV200: "Varistor", Manufacturer_Name=TDK, Datasheet Link=https://www.tdk-electronics.tdk.com/inf/70/db/var/SIOV_Leaded_StandarD.pdf, Height=18.5mm, Manufacturer_Part_Number=S14K300
S1 S100: "Switch", Arrow Part Number="PTS636 SM43 SMTR LFS", Manufacturer_Name="C & K COMPONENTS", Mouser Part Number=611-PTS636SM43SMTRLF, Arrow Price/Stock=https://www.arrow.com/en/products/pts636-sm43-smtr-lfs/ck, Datasheet Link="https://componentsearchengine.com/Datasheets/1/PTS636 SM43 SMTR LFS.pdf", Height=4.5mm, Manufacturer_Part_Number="PTS636 SM43 SMTR LFS", Mouser Price/Stock=https://www.mouser.co.uk/ProductDetail/CK/PTS636-SM43-SMTR-LFS?qs=vLWxofP3U2xu5raMGkTmHg%3D%3D
SB1 SB2 SB3 SB6 SB7: library part SOLDERBRIDGE_SHORTED, "Shorted Solderbridge", Part Number="Solderbridge Shorted", Artikkelnr Noca=N.A., Artikkelnr Simpro=N.A., Footprint Doc=Solderbridge_Shorted, LatestRevisionDate=2012-08-07, Pin Count=2, Published=2012-08-07, Publisher="Nordic Semiconductor"
SB200: library part SOLDERBRIDGE_OPEN_1, "Open Solderbridge", Artikkelnr Noca=N.A., Artikkelnr Simpro=N.A., Footprint Doc=Solderbridge, LatestRevisionDate=2009-12-14, Part Number=Solderbridge, Pin Count=2, Published=2009-12-14, Publisher="Nordic Semiconductor"
U1: library part N11, "N11 is a low-power consumption and high-performance GSM/GPRS module. Its dimensions are 13.8 x 15.8 x 2.5 mm. Its pins are packaged in LGA, which reduces product area."
U2: library part e5aacda1e23edf748dee3cec588ab45, "IC TRNSLTR BIDIRECTIONAL US8", Case/Package=VSSOP, High Level Output Current=-20uA, Low Level Output Current=20uA, Max Operating Temperature=85°C, Max Supply Voltage=5.5V, Min Operating Temperature=-40°C, Min Supply Voltage=1.2V, Package Quantity=3000, Data Rate=100Mbps, Lead Free="Contains Lead", Logic Function=Translator, Mount="Surface Mount", Number of Bits=2, Number of Channels=2, Number of Pins=8, Output Type=3-STATE, Packaging="Tape and Reel", Propagation Delay=31ns, Radiation Hardening=No, RoHS Compliant=Yes, Series=-, Turn-On Delay Time=7.4ns, Weight=0.000339oz
U3: "No Description Available", Manufacturer="Texas Instruments", PartNumber=MSP430FR2633IDAR, Alternate_PartNumber=MSP430FR2633IDA, CompType=IC, Copyright="Copyright (C) 2022 Ultra Librarian. All rights reserved.", Manufacturer_Part_Number=MSP430FR2633IDA, Mfr_Name="Texas Instruments", MountType=SMT, PackageReference=DA0032A, RefDes=RefDes, Type=DEV
U100: "No Description Available", Mfr_Name="Texas Instruments", Copyright="Copyright (C) 2022 Ultra Librarian. All rights reserved.", Manufacturer_Part_Number=MSP430I2040TRHBR, RefDes=RefDes, Type=DEV
U300 U301: "No Description Available", Mfr_Name="Toshiba Electronic Devices & Storage Corp.", Number_devices_in_Package=1, Copyright="Copyright (C) 2022 Ultra Librarian. All rights reserved.", Manufacturer_Part_Number=TLP2395, RefDes=RefDes, Source_Package=TLP2395, Type=DEV
USB1: "Connector", Manufacturer_Name="Amphenol Communication Solutions", Mouser Part Number=649-10118192-0002LF, Arrow Part Number=10118192-0002LF, Arrow Price/Stock=https://www.arrow.com/en/products/10118192-0002lf/amphenol-fci?region=nac, Datasheet Link=https://www.amphenol-cs.com/media/wysiwyg/files/drawing/10118192.pdf, Height=3.05mm, Manufacturer_Part_Number=10118192-0002LF, Mouser Price/Stock=https://www.mouser.co.uk/ProductDetail/Amphenol-FCI/10118192-0002LF?qs=KVgMXE4aH4nIkuWlMxQzog%3D%3D

## Via types
v1: diameter 0.457, hole 0.254, Top Layer to Bottom Layer, 88 vias
v2: diameter 0.762, hole 0.381, Top Layer to Bottom Layer, 20 vias

## Nets (pads, with @x,y where several pads share a name; then routed paths per layer and width w, separated by ;. In a path a pad name is that pad's centre, name@x,y a point inside that pad or via, vN(x,y) a via of type N, cw(c..) or ccw(c..) an arc to the next point about the centre after c; other vN are vias at no path point)
3.3v: C9.2 C11.1 C12.2 C19.2 C301.2 J3.1 J4.1 J5.1 J200.1 LED1.1 P1.3 Q300.2 R12.2 R301.2 U2.7 U3.4 U5.5 U301.6 | length 31.5
  Top Layer w0.254: C12.2 C12.2@13.589,18.923 ; v1(14.323,12.211) 14.362,12.25 14.741,12.25 15.138,12.647 15.138,13.984 R12.2 ; C11.1 16.129,18.923 16.768,19.562 17.492,19.562 U3.4@18.144,19.562 ; v1(27.305,18.796) 27.305,19.939 28.054,20.688 C9.2 29.507,20.391 29.901,20.391 31.096,19.196 31.096,19.018 31.118,18.996 U2.7@31.118,18.834 ; LED1.1 LED1.1@35.409,12.446
  Top Layer w0.381: LED1.1@35.409,12.446 v1(37.338,12.446)
  Top Layer w0.508: C19.2 4.609,22.63 U5.5@4.609,24.43 ; P1.3@9.144,16.129 P1.3 11.811,18.796 C12.2 ; C12.2@13.589,18.923 C11.1
  Top Layer w0.762: C19.2 4.585,22.636 4.664,22.715 5.062,22.715 7.072,24.725 v1(7.239,24.892) 9.652,24.892 v1(9.716,24.956) 9.729,24.942 v1(12.142,24.942)
3.3V_AFE: C101.2 C102.1 C205.2 C300.2 D400.1 D403.1 P100.3 R100.2 R200.2 U100.13 U200.5 U300.6
+2.8: C10.2 U1.15 U2.3 U2.6 | length 12
  Top Layer w0.254: U2.3@31.619,15.748 v1(31.619,17.335) ; v1(31.619,17.335) U2.6 ; C10.2@60.301,20.471 C10.2
  Top Layer w0.381: v1(52.324,18.161) 54.483,18.161 v1(55.245,18.923) 56.92,20.598 U1.15 C10.2@60.325,20.598
+4: C3.1 C4.2 C5.1 C6.1 C7.2 C16.2 C17.2 L1.2 R14.2 U1.2 U1.3 | length 54.1
  Top Layer w0.254: L1.2@21.336,29.405 L1.2 ; C4.2 28.527,28.076 28.527,29.893 28.321,30.099 C6.1 30.453,31.456 C7.2 30.607,31.356 30.607,28.155 C3.1 ; C5.1@35.653,28.028 36.576,27.105 C5.1
  Top Layer w0.381: R14.2 13.091,38.354 13.411,38.034 13.411,37.898 v1(14.224,37.084)
  Top Layer w0.762: L1.2@21.336,29.405 C16.2 21.337,33.529 24.001,33.529 C17.2 v1(24.003,31.623) v1(24.003,27.305) ; C3.1 C5.1@35.653,28.028 ; C5.1 36.852,26.598 U1.2 U1.3
  Bottom Layer w0.381: v1(14.224,37.084) 19.685,31.623 v1(24.003,31.623)
  other v1: 24.003,29.337 28.527,29.838
+5: C15.1 C18.2 C202.1 C203.1 D201.1 J6.1 J201.1 M200.7 U4.3 U4.5 U5.1 U5.3 USB1.1 | length 34.6
  Top Layer w0.254: U5.3 2.906,27.027 2.906,27.664 3.055,27.813 4.609,27.813 ; 18.857,35.621 18.948,35.712 ; C15.1@20.137,38.258 20.32,38.441 C15.1
  Top Layer w0.381: U5.1@4.524,26.745 U5.1 ; C18.2 4.609,28.678 4.609,27.813 U5.1@4.609,26.878 ; USB1.1 8.433,38.018 8.732,37.719 v1(8.753,37.719) 8.753,36.504 v1(9.398,35.859) 10.586,34.671 U4.5 15.546,34.78 16.025,34.78 16.395,35.151 16.395,35.251 16.765,35.621 U4.3
  Top Layer w0.508: U4.3 18.857,35.621 ; 18.948,35.712 20.32,37.084 20.32,38.441 C15.1@20.32,38.481
  Top Layer w0.762: C18.2 v1(6.604,28.702) v1(9.144,28.702) ; v1(21.463,40.64) J6.1@27.898,40.64
  other v1: 23.495,40.64 25.527,40.64
+5_AFE: C204.2 U200.1 U200.3
+12: C200.1 C201.1 D200.1 M200.5
AFE_RX: U100.19 U300.5
AFE_SBWTCK: P100.1 U100.16
AFE_SWTDIO: C100.2 P100.6 R100.1 S100.1 U100.15
AFE_TX: R302.1 U100.20
BL_RX: J5.4 SB7.2 U3.8 | length 36.8
  Top Layer w0.254: v1(16.383,2.921) 17.145,2.159 29.151,2.159 29.337,2.345 J5.4 ; U3.8 20.321,16.962 20.519,16.764 v1(20.574,16.764) ; SB7.2 v1(20.574,10.541)
  Bottom Layer w0.254: v1(16.383,2.921) 16.383,8.233 18.684,10.534 20.567,10.534 v1(20.574,10.541) v1(20.574,16.764)
BL_TX: J5.2 P1.4 SB6.1 U3.7 | length 48.8
  Top Layer w0.254: P1.4 11.733,11.254 20.723,11.254 21.717,10.26 21.717,8.581 22.02,8.278 22.02,8.024 22.098,7.946 SB6.1 ; v1(17.78,3.048) 26.797,3.048 27.143,3.394 27.905,3.394 J5.2 ; U3.7 21.631,17.612 v1(21.717,17.526)
  Bottom Layer w0.254: v1(17.78,3.048) 17.78,7.874 18.542,8.636 v1(21.717,8.636) v1(21.717,17.526)
D_GND: C301.1 J200.10 J201.10 R304.1 U300.3 U301.4
DECT_1: J5.6 J200.6 U3.9 | length 33.7
  Top Layer w0.254: v1(14.933,2.847) 14.963,2.817 14.963,2.237 15.549,1.651 29.718,1.651 30.607,2.54 J5.6 ; v1(16.637,16.256) 16.665,16.284 18.243,16.284 U3.9
  Bottom Layer w0.254: v1(14.933,2.847) 14.933,14.552 v1(16.637,16.256)
DECT_2: J5.5 J200.5 U3.10 | length 21.5
  Top Layer w0.254: U3.10 21.742,15.662 21.917,15.836 22.44,15.836 v1(22.479,15.875) ; v1(24.638,7.239) 25.019,7.62 29.972,7.62 30.55,7.042 30.55,6.153 J5.5
  Bottom Layer w0.254: v1(22.479,15.875) 22.479,14.478 23.495,13.462 23.495,10.604 23.622,10.477 23.622,7.62 24.003,7.239 v1(24.638,7.239)
DECT_3: J5.7 J200.7 U3.11 | length 21.2
  Top Layer w0.254: U3.11 23.596,15.012 v1(23.622,14.986) ; v1(24.511,8.636) 24.511,8.581 24.964,8.128 30.861,8.128 32.004,6.985 32.004,6.223 J5.7
  Bottom Layer w0.254: v1(23.622,14.986) 24.511,14.097 v1(24.511,8.636)
E: J203.2
E_OUT: J204.2
FET_PWR_OUT: P1.5
GND: C1.2 C2.2 C3.2 C4.1 C5.2 C6.2 C7.1 C8.1 C9.1 C10.1 C11.2 C12.1 C13.1 C15.2 C16.1 C17.1 C18.1 C19.1 C100.1 C101.1 C102.2 C104.2 C200.2 C201.2 C202.2 C203.2 C204.1 C205.1 C300.1 C400.2 C402.2 D2.A D3.A D4.A D5.A D100.2 D101.2 D200.2 D201.2 D202.2 J1.2 J1.3 J2.C5 J3.4 J4.4 J5.10 J6.10 J202.01 M200.6 M200.8 P1.2 P100.2 Q1.2 R2.1 R4.1 R15.2 S1.2 S100.2 U1.1 U1.4 U1.10 U1.19 U2.2 U3.3 U4.1 U5.2 U100.12 U100.33 U200.2 U300.4 U301.3 USB1.5 | length 68.7
  Top Layer w0.254: P1.2 P1.2@9.525,18.796 ; v1(13.462,13.716) C13.1 ; C11.2@15.113,20.212 15.174,20.273 17.644,20.273 17.704,20.212 U3.3@18.144,20.212 ; R15.2 16.747,38.354 16.764,38.371 v1(16.764,39.878) ; C17.1 v1(24.003,35.941) ; 28.321,33.421 v1(28.321,34.036) ; v1(28.575,25.273) C4.1 ; C7.1 v1(30.48,33.909) ; U2.2 31.116,14.605 v1(33.909,14.605) ; v1(34.671,33.782) 36.416,33.782 C5.2 36.576,33.748 37.499,34.671 v1(38.354,34.671) ; R2.1@60.452,22.087 60.452,21.923 60.615,21.76 60.816,21.76 61.639,20.937 61.91,20.937 62.243,20.604 C10.1@62.243,20.574
  Top Layer w0.381: v1(1.651,28.702) C18.1 ; USB1.5 7.762,35.418 8.636,34.544
  Top Layer w0.508: C19.1 3.035,21.095 3.048,21.082 v1(3.048,20.955) ; 3.683,25.654 U5.2 ; S1.2 S1.2@3.937,18.415 ; v1(5.588,18.923) 4.433,18.923 S1.2@3.937,18.427 ; 8.636,34.544 8.636,33.401 v1(8.763,33.274) ; P1.2@9.525,18.796 11.176,20.447 13.361,20.447 C12.1 13.535,20.273 C11.2 ; U4.1 19.492,33.721 v1(19.525,33.688) ; C15.2 19.01,39.838 v1(19.05,39.878) ; C16.1@21.09,34.8 C16.1 21.463,35.173 v1(21.463,35.941) ; C17.1@23.747,35.295 23.993,35.049 C17.1 ; v1(27.813,22.733) 27.813,22.536 28.111,22.238 C9.1 ; 28.321,33.421 C6.2 C6.2@28.442,32.927 ; C7.1@30.467,33.02 C7.1 ; v1(30.48,25.4) C3.2 ; R4.1 33.959,20.563 36.061,20.563 Q1.2 v1(36.111,19.474) ; v1(43.585,23.598) U1.4 ; v1(43.688,14.605) 45.078,14.605 U1.10 ; v1(43.688,28.067) 45.054,28.067 U1.1 ; v1(47.244,2.794) 47.343,2.695 D2.A D5.A D4.A ; C8.1 48.334,7.707 48.334,8.583 v1(49.149,9.398) 49.431,9.68 D3.A ; U1.19 U1.19@58.885,26.598 ; U1.19@59.067,26.416 U1.19@58.885,26.598 ; v2(60.316,26.697) 60.247,26.697 60.148,26.598 U1.19@58.885,26.598 ; v1(61.862,19.431) 61.875,19.444 C10.1 ; S1.2@3.937,18.415 3.429,18.415 3.937,18.923 S1.2@3.937,18.427 ; S1.2@3.937,18.415 S1.2@3.937,18.427
  Bottom Layer w0.508: J2.C5 v1(48.895,15.24)
  other v1: 13.843,27.559 15.367,27.559 13.081,29.591 9.017,31.115 11.049,31.115 13.081,31.115 10.922,33.401 13.081,33.401
  other v2: 61.768,28.039 62.357,29.464 59.509,29.493 54.483,29.591 56.134,29.591 57.785,29.591 62.357,31.115 59.182,32.639 62.357,32.766 59.182,34.29 62.357,34.417 62.357,36.068 57.658,37.719 59.309,37.719 62.357,37.719 57.658,39.243 57.658,40.64 59.182,41.656 62.103,41.656
I1+: C400.1 C401.2 R400.1 U100.5
I1-: C401.1 C402.1 R402.1 U100.6
I+: U100.3
I-: U100.4
IO_IN: J6.5 J201.5 U3.20 U100.17 | length 34.3
  Top Layer w0.254: v1(21.59,18.796) 24.511,15.875 24.511,13.861 24.66,13.712 U3.20
  Bottom Layer w0.254: v1(21.59,18.796) 21.59,22.733 25.527,26.67 25.527,37.846 26.924,39.243 29.257,39.243 30.607,40.593 J6.5
IO_OUT: J6.6 J201.6 U3.31 U100.18 | length 21.8
  Top Layer w0.254: v1(24.257,20.955) 24.35,20.862 U3.31
  Bottom Layer w0.254: v1(24.257,20.955) 24.257,21.463 23.622,22.098 23.622,22.987 26.67,26.035 26.67,34.116 30.607,38.053 J6.6
L: J203.3
LED1: R9.1 U3.15 | length 13.3
  Top Layer w0.254: U3.15@18.144,12.412 23.529,12.412 24.892,11.049 29.08,11.049 29.987,10.142 30.047,10.142 30.35,9.839 R9.1
LED2: R10.1 U3.18 | length 5.5
  Top Layer w0.254: U3.18@25.544,12.412 U3.18 28.99,12.412 29.464,11.938 R10.1@29.972,11.938 ; R10.1 R10.1@29.972,11.938 ; R10.1@30.353,11.938 R10.1@29.972,11.938
LED3: R11.1 U3.21 | length 6.3
  Top Layer w0.254: U3.21@25.544,14.362 27.802,14.362 28.956,13.208 R11.1 ; R11.1@30.353,13.589 30.099,13.589 30.416,13.271 R11.1@30.607,13.081
MCU_RX: J200.4 SB2.2 U2.8 U3.22 U301.5 | length 21.9
  Top Layer w0.254: U3.22 29.565,15.012 v1(29.591,14.986) ; v1(29.591,18.669) 29.646,18.669 29.697,18.72 U2.8 ; v1(33.02,8.001) 33.075,8.001 33.202,7.874 SB2.2
  Bottom Layer w0.254: v1(29.591,18.669) 29.591,11.303 31.223,9.671 31.35,9.671 v1(33.02,8.001)
MCU_RX_TEST: J3.3 SB2.1 | length 3.1
  Top Layer w0.254: SB2.1 38.395,7.082 38.608,6.868 J3.3
MCU_TX: J200.2 R300.2 SB3.2 U2.1 U3.23 | length 23.9
  Top Layer w0.254: U3.23 v1(27.686,15.662) U2.1@30.519,15.662 ; v1(27.686,8.89) 38.384,8.89 38.931,8.343 39.028,8.343 SB3.2
  Bottom Layer w0.254: v1(27.686,8.89) v1(27.686,15.662)
MCU_TX_TEST: J3.2 SB3.1 | length 3.2
  Top Layer w0.254: J3.2 39.878,6.324 40.173,6.619 SB3.1
N: C103.1 C105.2 C107.1 D102.2 D401.2 D404.2 J202.02 J203.1 J401.02 R107.1 R108.1 SB200.1 SB200.2 U100.10
N_OUT: J204.3
NetC1_1: C1.1 R1.1 U1.20 | length 6.4
  Top Layer w0.345: U1.20 59.638,28.162 ccw(c59.58,29.416) 60.833,29.476 C1.1 R1.1
NetC2_1: C2.1 J1.1 R1.2 | length 4.1
  Top Layer w0.345: R1.2 C2.1 J1.1
NetC14_1: C14.1 U4.6 | length 3.3
  Top Layer w0.381: C14.1 15.402,30.528 15.402,33.686 U4.6
NetC14_2: C14.2 L1.1 U4.2 | length 9.2
  Top Layer w0.381: C14.2 17.572,28.943 L1.1 16.825,29.716 16.825,32.851 16.764,32.912 16.764,34.448 16.987,34.671 U4.2
NetC103_2: C103.2 U100.9
NetC104_1: C104.1 U100.14
NetD1_A: D1.A U1.17 | length 2.1
  Top Layer w0.508: U1.17 58.297,23.61 60.344,23.61 D1.A
NetD1_C: D1.C R2.2 | length 1.5
  Top Layer w0.254: D1.C 62.012,23.586 R2.2@62.012,22.098
NetD3_C: D3.C J2.C7 R5.1 R8.2 | length 8.8
  Top Layer w0.254: R5.1 50.391,7.494 D3.C R8.2 ; v1(52.47,12.084) 52.509,12.046 52.509,11.526 R8.2@52.732,11.303
  Bottom Layer w0.254: v1@52.437,12.117 53.975,13.655 J2.C7
NetD4_C: D4.C J2.C3 R7.2 | length 6
  Top Layer w0.254: D4.C 53.467,3.775 54.352,4.66 54.444,4.66 v1(54.483,4.699) 54.864,5.08 R7.2
  Bottom Layer w0.254: J2.C3 53.975,4.191 v1(54.483,4.699)
NetD5_C: D5.C J2.C2 R6.2 | length 6.3
  Top Layer w0.254: D5.C 51.054,3.775 51.812,4.533 52.285,4.533 v1(52.324,4.572) 52.578,4.826 R6.2@52.578,5.969
  Bottom Layer w0.254: J2.C2 51.435,3.683 v1(52.324,4.572)
NetD100_1: D100.1 R101.1
NetD101_1: D101.1 R102.1
NetD102_1: D102.1 R105.2 R106.1 R107.2
NetD202_1: D202.1 R200.1
NetD400_2: D400.2 D401.1 D402.1 FL400.1 J400.02
NetD402_2: D402.2 D403.2 D404.1 FL401.1 J400.01
NetF200_2: F200.2 M200.2 RV200.1
NetFL400_2: FL400.2 R400.2 R401.2
NetFL401_2: FL401.2 J401.01 R401.1 R402.2
NetLED1_2: LED1.2 R11.2 | length 2.5
  Top Layer w0.508: R11.2@32.059,13.208 33.762,13.208 34.15,12.82 34.15,12.605 LED1.2
NetLED1_3: LED1.3 R10.2 | length 2.5
  Top Layer w0.508: R10.2 33.719,11.557 34.206,11.07 LED1.3
NetLED1_4: LED1.4 R9.2 | length 4
  Top Layer w0.508: R9.2 34.141,9.779 35.213,10.851 35.213,10.956 LED1.4
NetM200_3: M200.3 RV200.2
NetQ1_1: Q1.1 R3.2 R4.2 | length 4.5
  Top Layer w0.254: R3.2 R4.2 36.011,22.313 Q1.1
NetQ1_3: Q1.3 U1.5 | length 7
  Top Layer w0.254: Q1.3 39.37,21.463 40.005,22.098 U1.5
NetQ300_1: Q300.1 R303.2
NetQ300_3: Q300.3 R304.2
NetR13_1: R13.1 R15.1 U4.4 | length 5.1
  Top Layer w0.254: U4.4@15.371,35.687 U4.4
  Top Layer w0.381: R13.1 R13.1@13.335,35.687
  Top Layer w0.508: R13.1@13.335,35.687 U4.4@15.371,35.687 ; R15.1 15.367,38.254 15.367,35.667 15.413,35.621 U4.4
NetR13_2: R13.2 R14.1 | length 2.6
  Top Layer w0.254: R13.2@11.611,35.851 R13.2
  Top Layer w0.762: R13.2@11.611,35.851 R14.1
NetR101_2: R101.2 U100.21
NetR102_2: R102.2 U100.22
NetR103_2: R103.2 R104.1
NetR104_2: R104.2 R105.1
NetR300_1: R300.1 U300.1
NetR302_2: R302.2 U301.1
ON/OFF: R3.1 SB1.1 U3.29 | length 32
  Top Layer w0.254: v1(23.368,19.558) 23.372,19.562 U3.29 26.111,19.562 26.184,19.635 26.239,19.635 26.67,20.066 26.67,22.987 27.432,23.749 29.718,23.749 30.48,22.987 30.48,21.336 30.891,20.925 31.311,20.925 R3.1
  Bottom Layer w0.254: v1(23.368,19.558) 22.733,20.193 22.733,23.114 26.162,26.543 26.162,35.179 SB1.1
ON/OFF_TEST: J6.4 SB1.2 | length 3.4
  Bottom Layer w0.254: SB1.2 27.646,36.363 29.337,38.053 J6.4
RELAY_CONTROL: J5.3 J200.3 R301.1 R303.1 U3.16 | length 16.6
  Top Layer w0.254: U3.16 22.277,11.762 22.567,11.472 22.567,11.088 v1(22.606,11.049) ; v1(23.368,6.731) 23.423,6.731 23.525,6.629 26.023,6.629 26.506,7.112 29.083,7.112 29.337,6.858 J5.3
  Bottom Layer w0.254: v1(22.606,11.049) 22.606,8.382 23.114,7.874 23.114,6.88 23.164,6.88 23.313,6.731 v1(23.368,6.731)
RELAY_L_OUT: J204.1 R103.1
RST/SBWTDIO: C13.2 P1.6 R12.1 S1.1 U3.5 | length 26.3